# Altium PCB MainBoard.PcbDoc (part 1 of 5)
Units mm, origin at the board's own origin, x right, y up, seen from the top; angles counter-clockwise.
Board outline 82.15 x 81.5 mm, 4 copper layers (Top Layer, GND Top, GND Bot, Bottom Layer), stack 1.57 mm thick; 116 components, 97 nets, 468 pads, 3117 vias.
Unrouted connection lines stored in the file: 5.
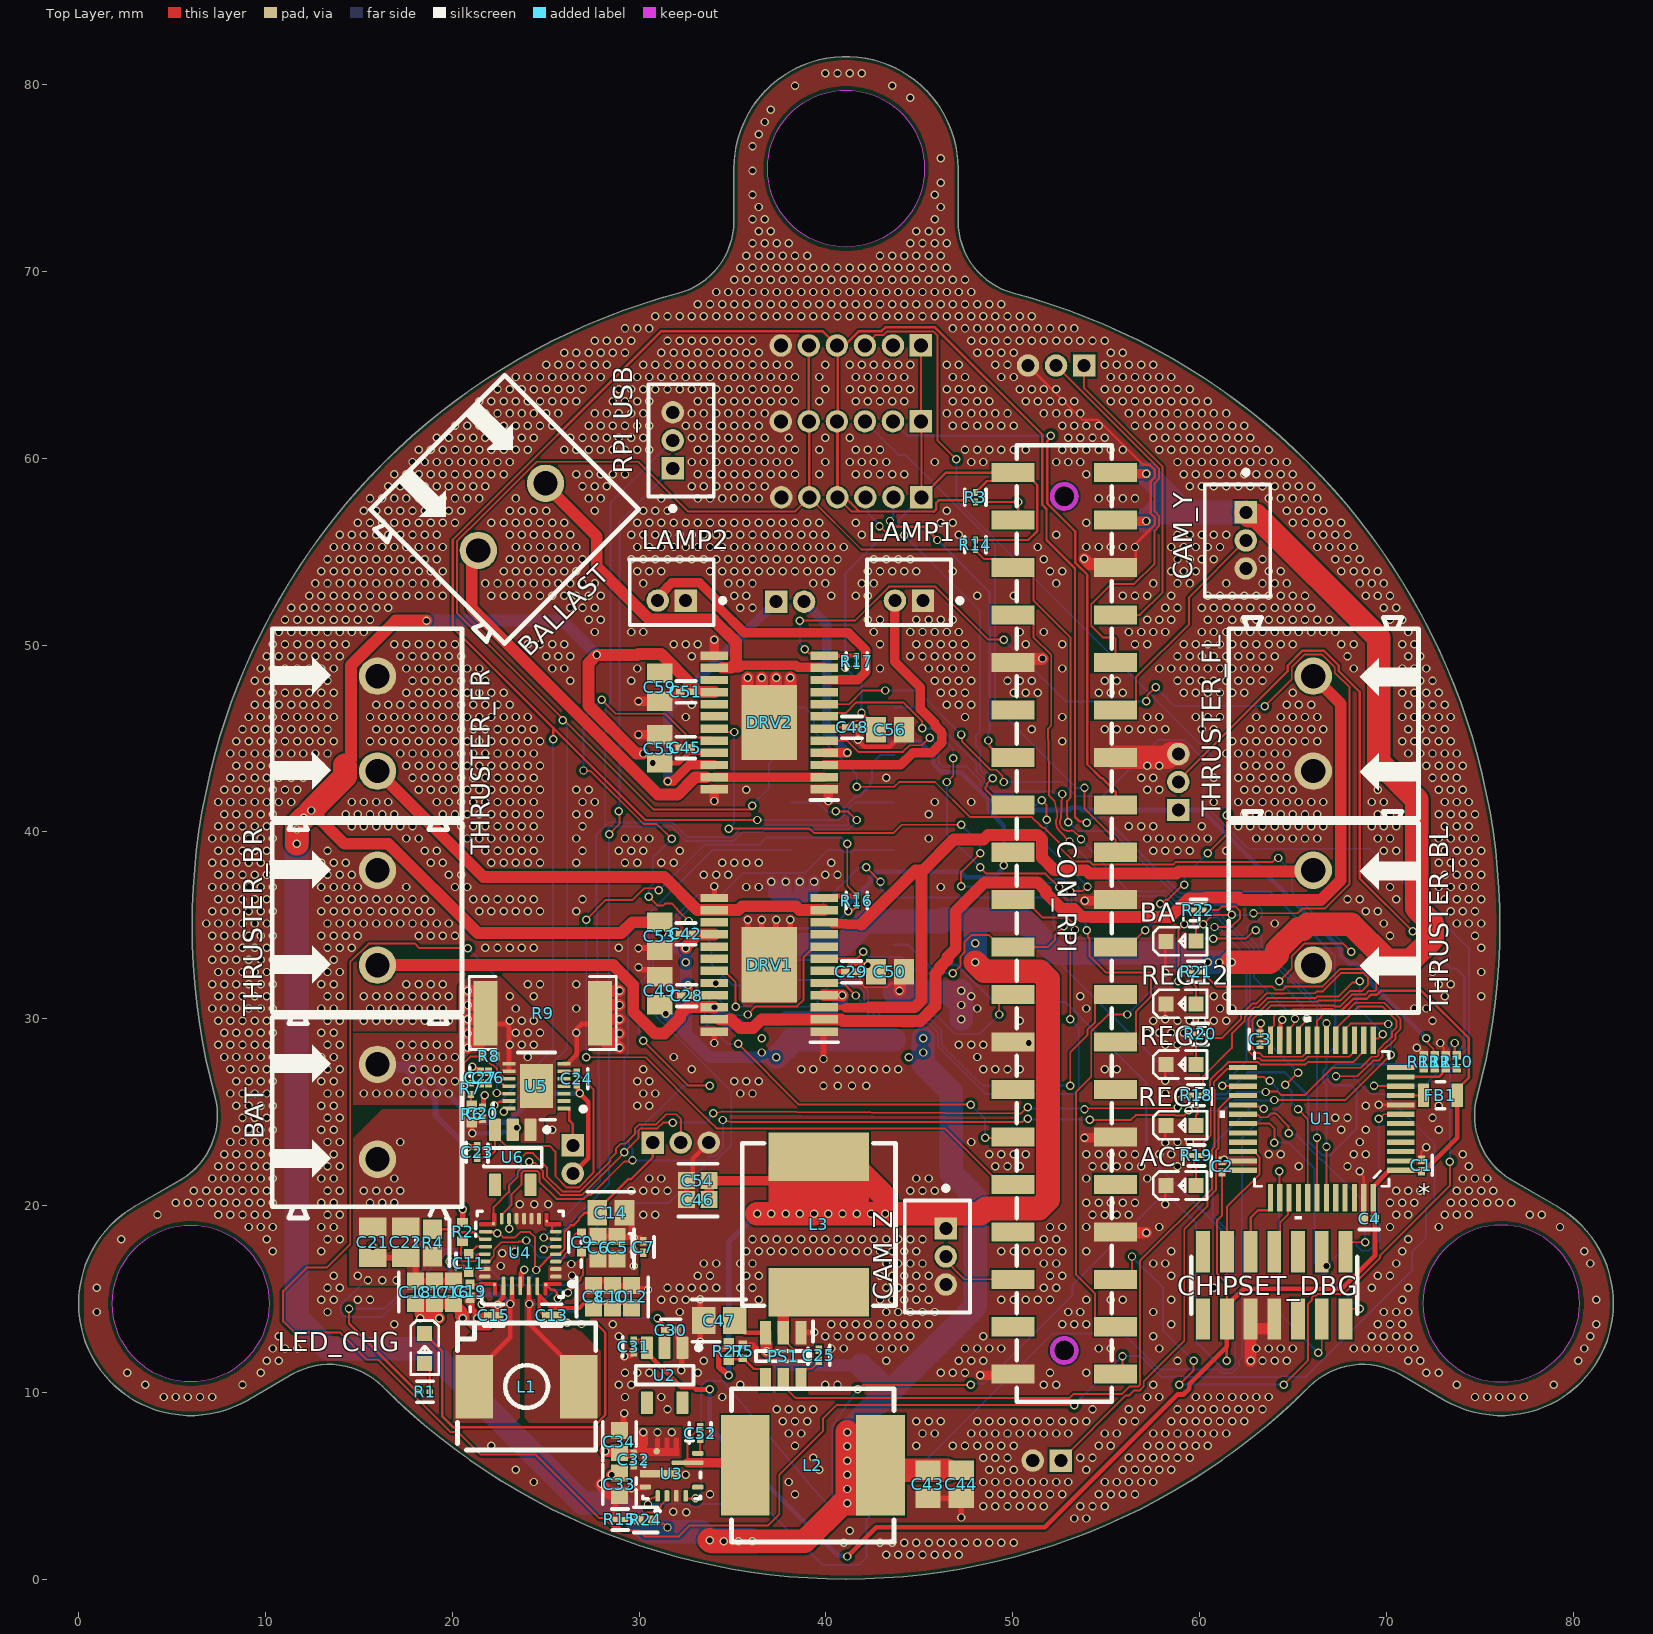
[diagram p0: Top Layer view]
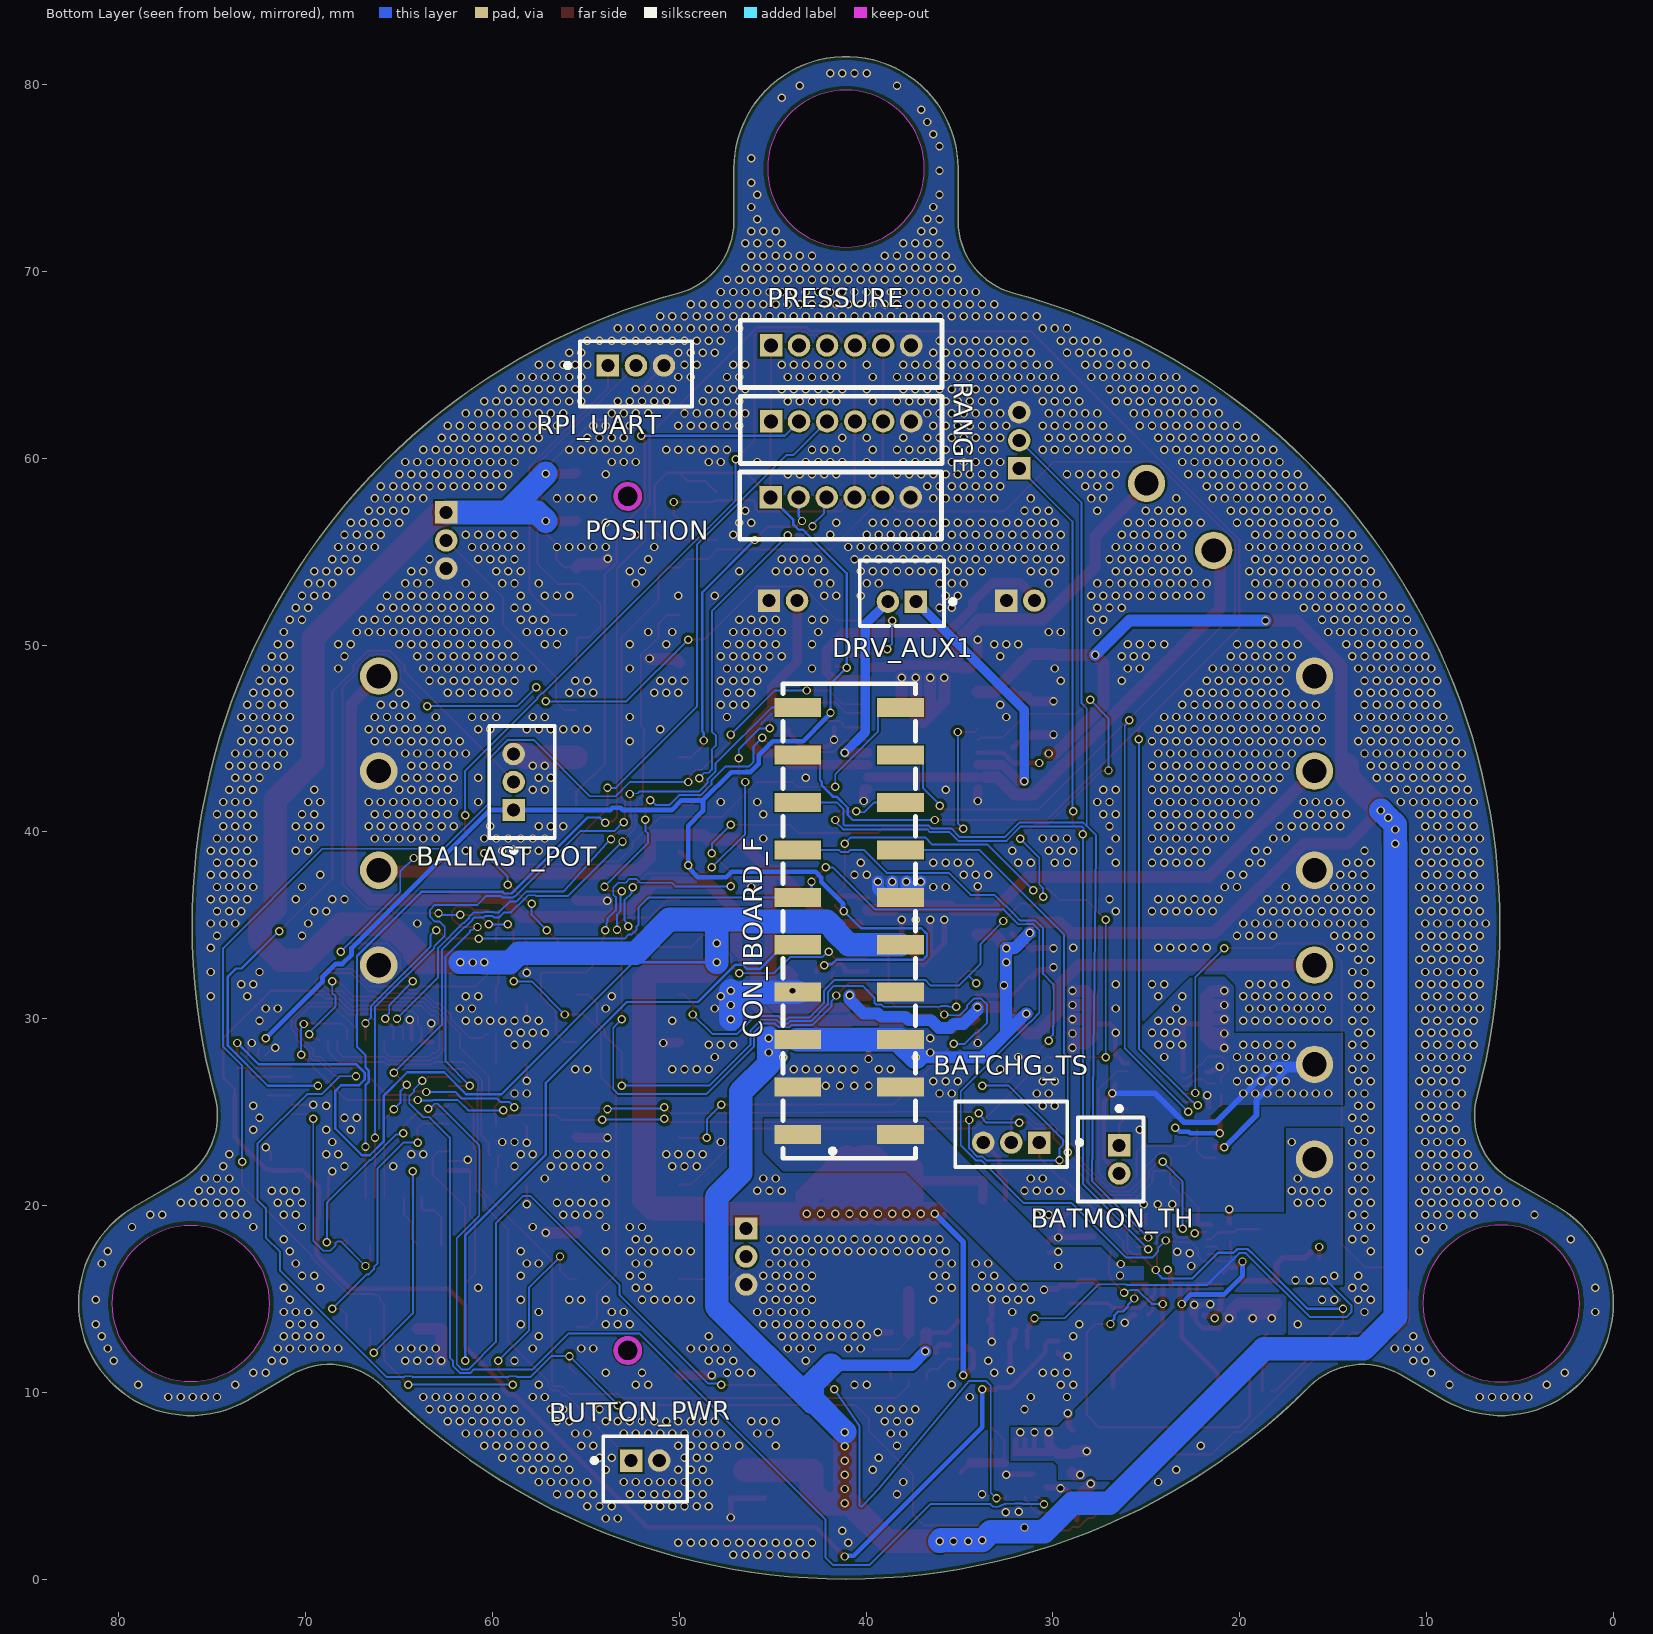
[diagram p1: Bottom Layer view, seen from below]
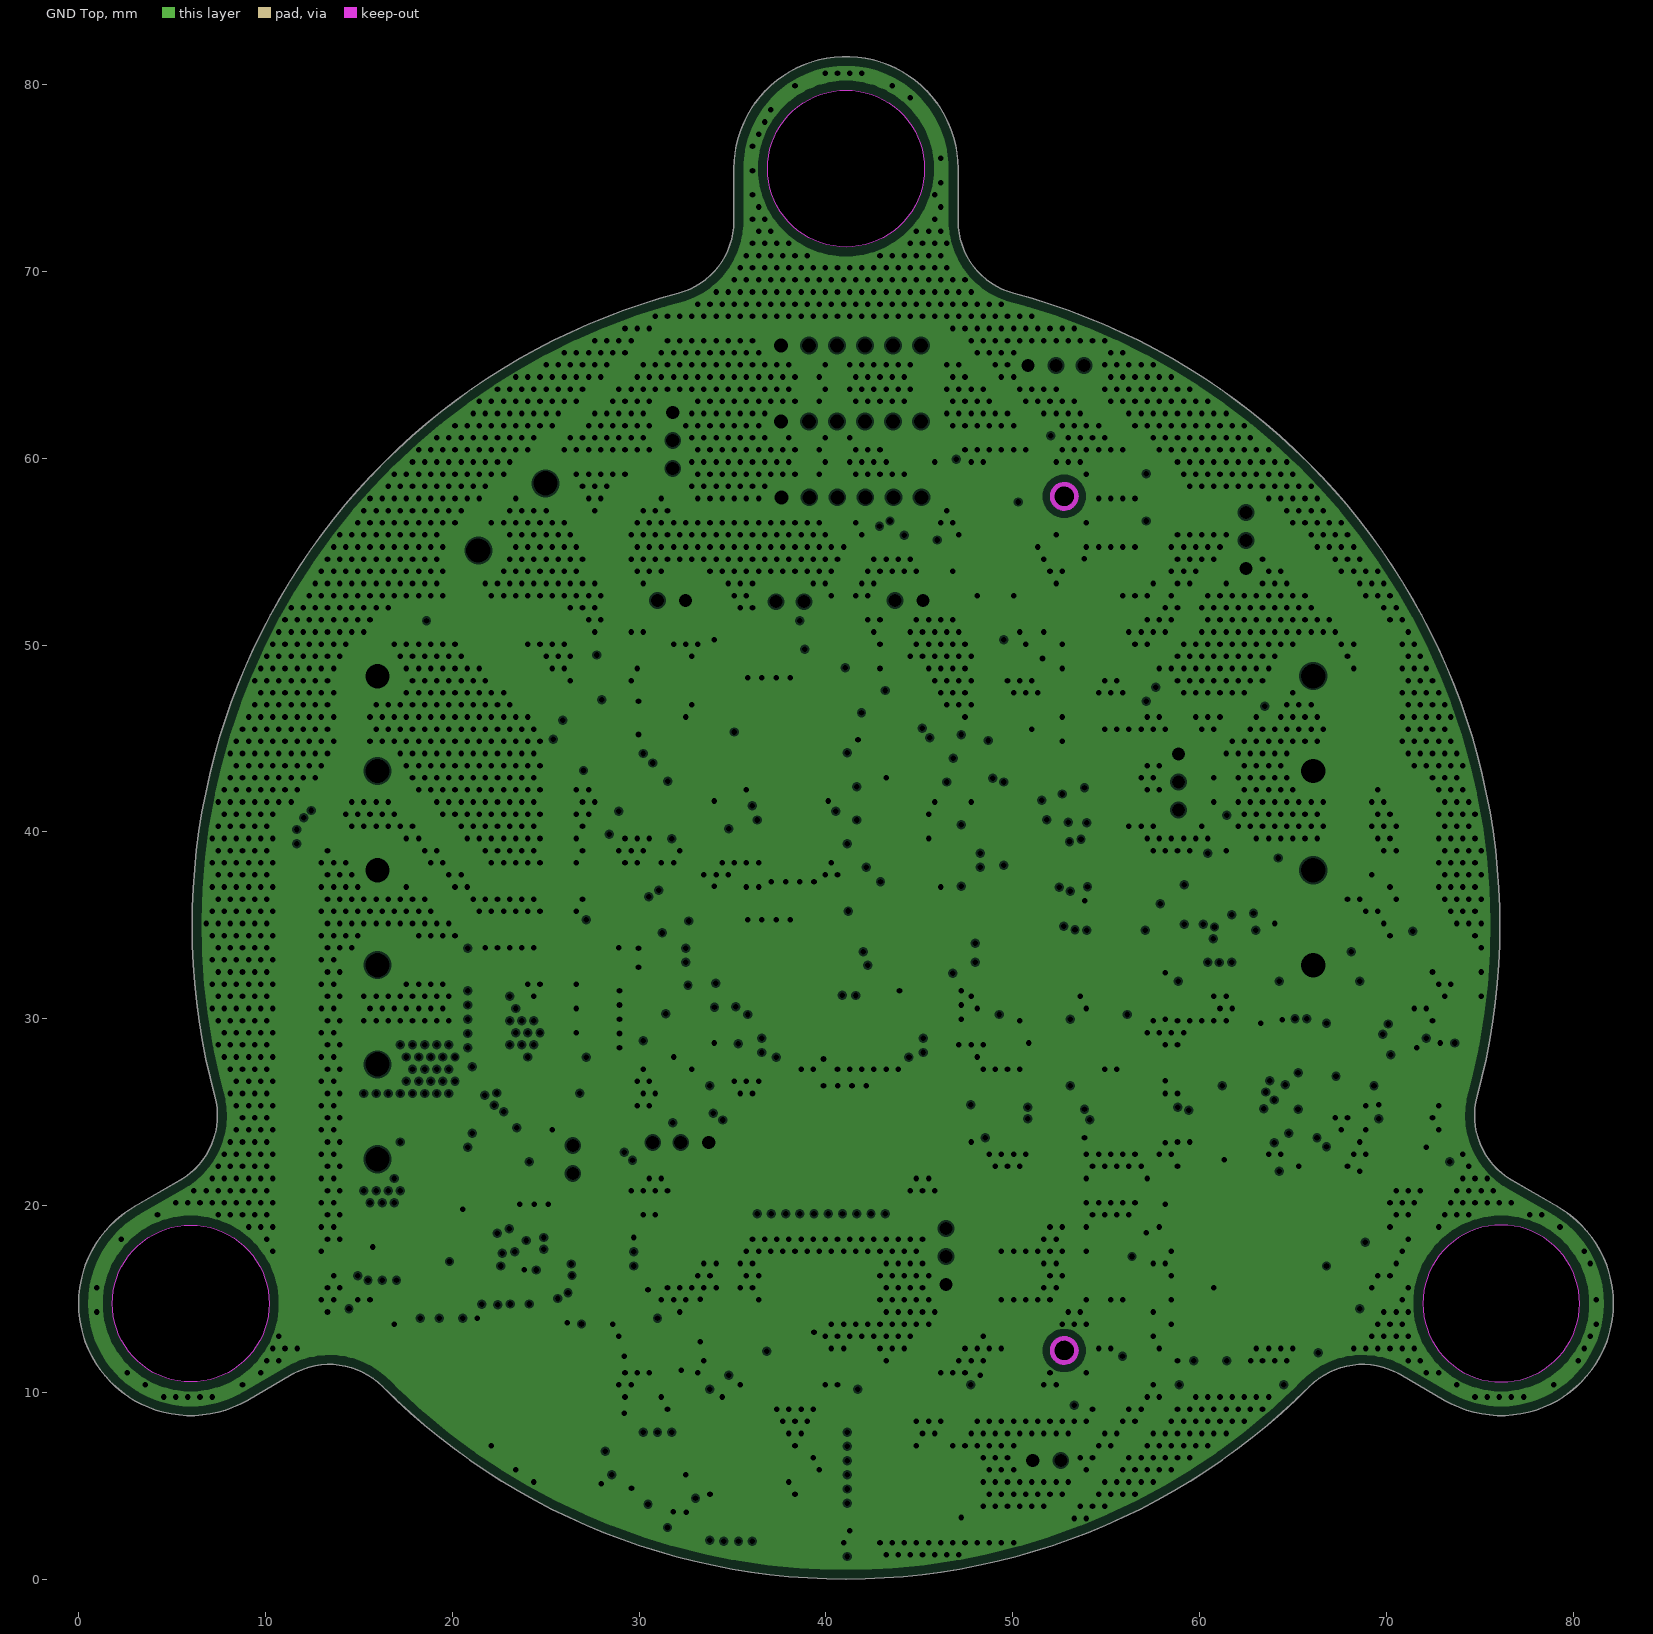
[diagram p2: GND Top, clearances drawn from the general rule]
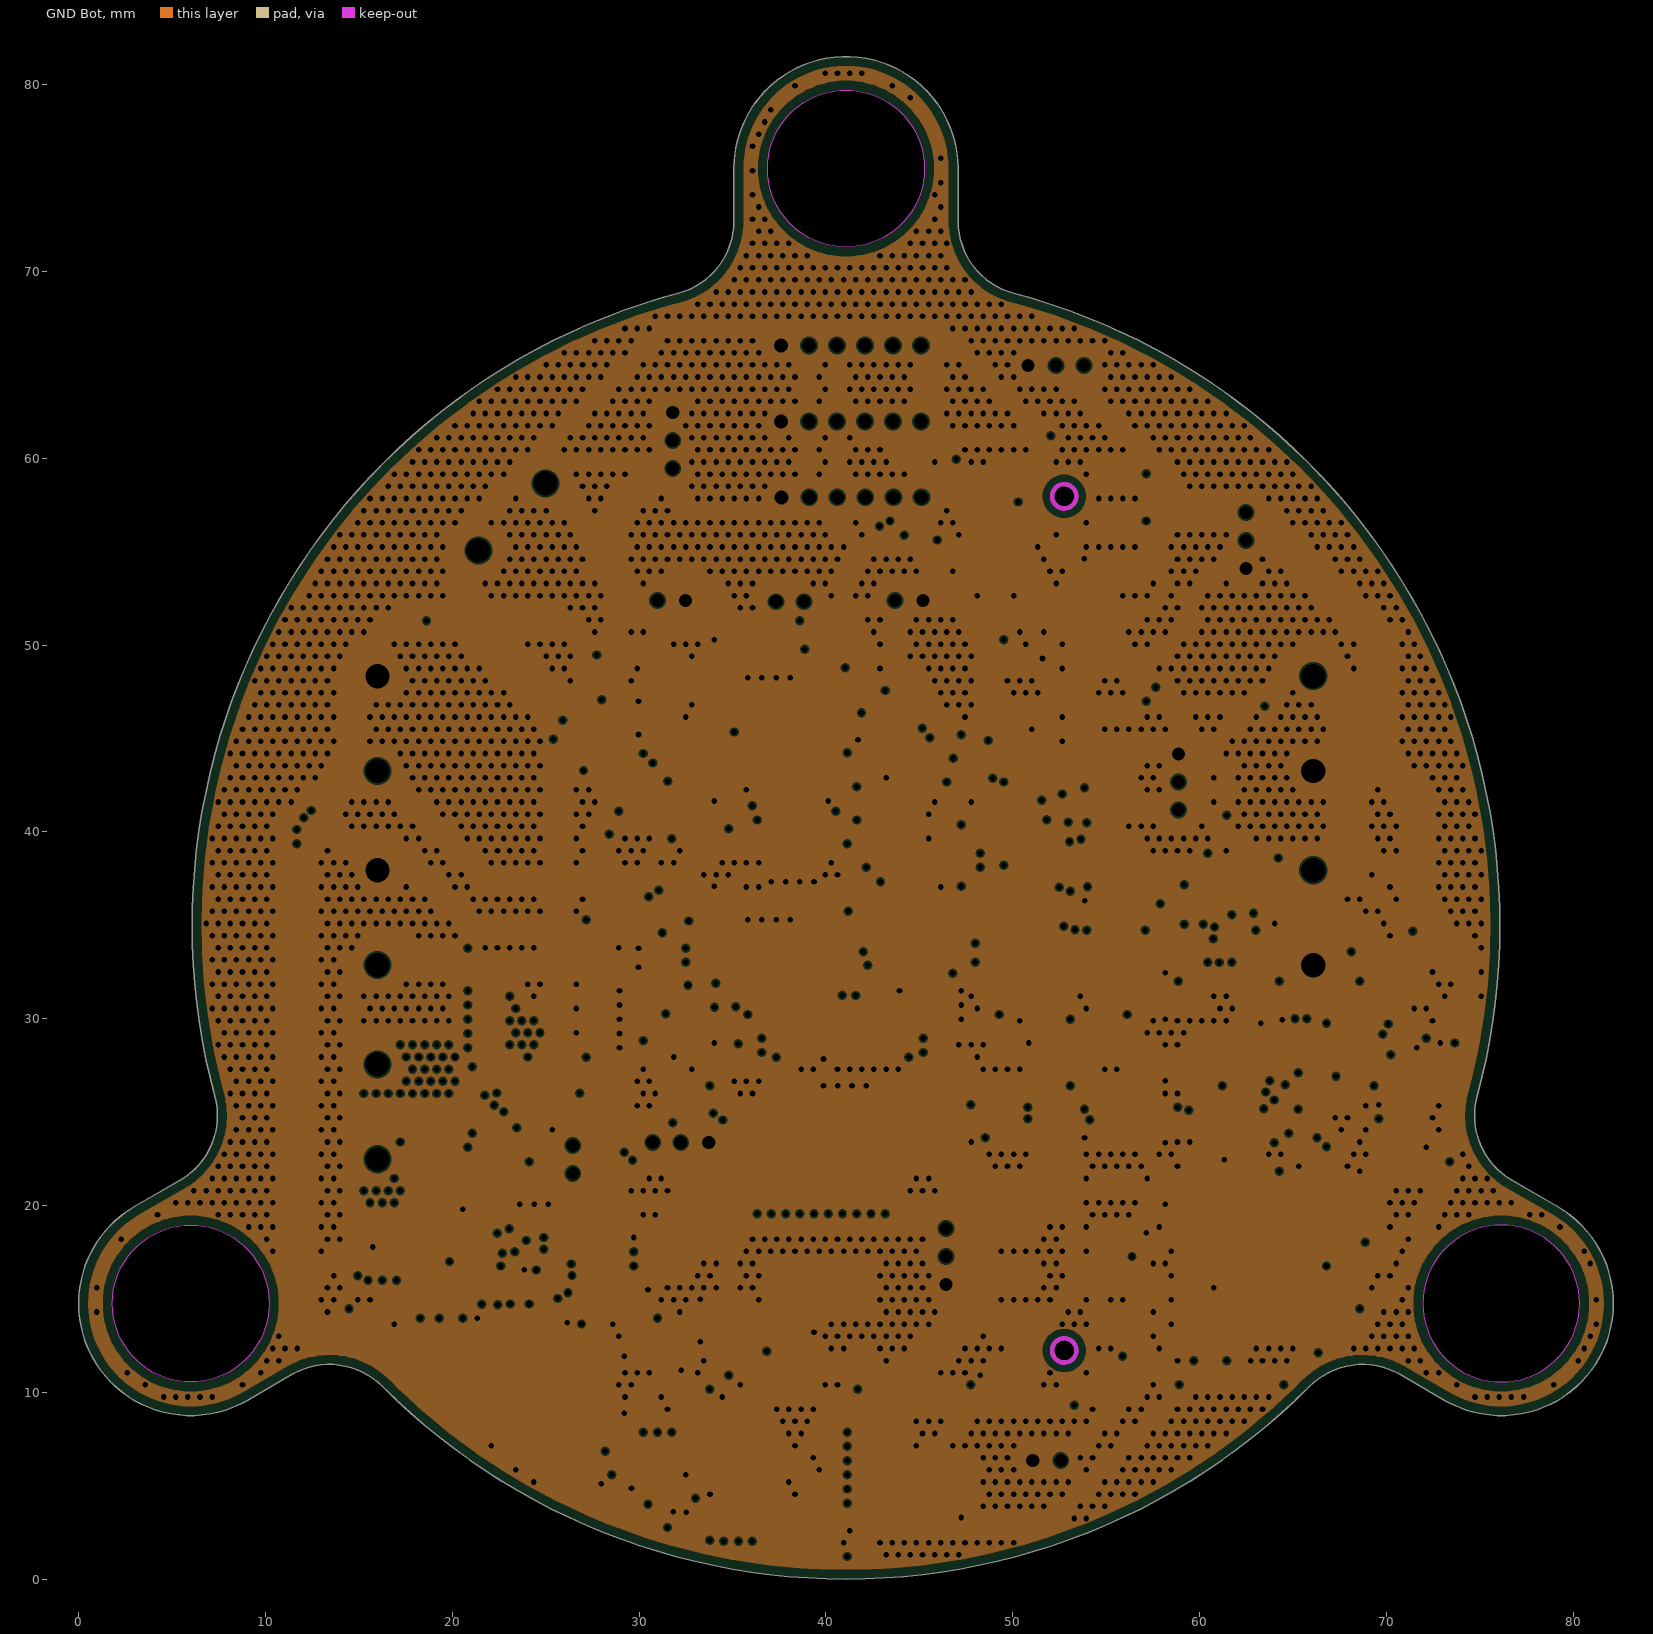
[diagram p3: GND Bot, clearances drawn from the general rule]
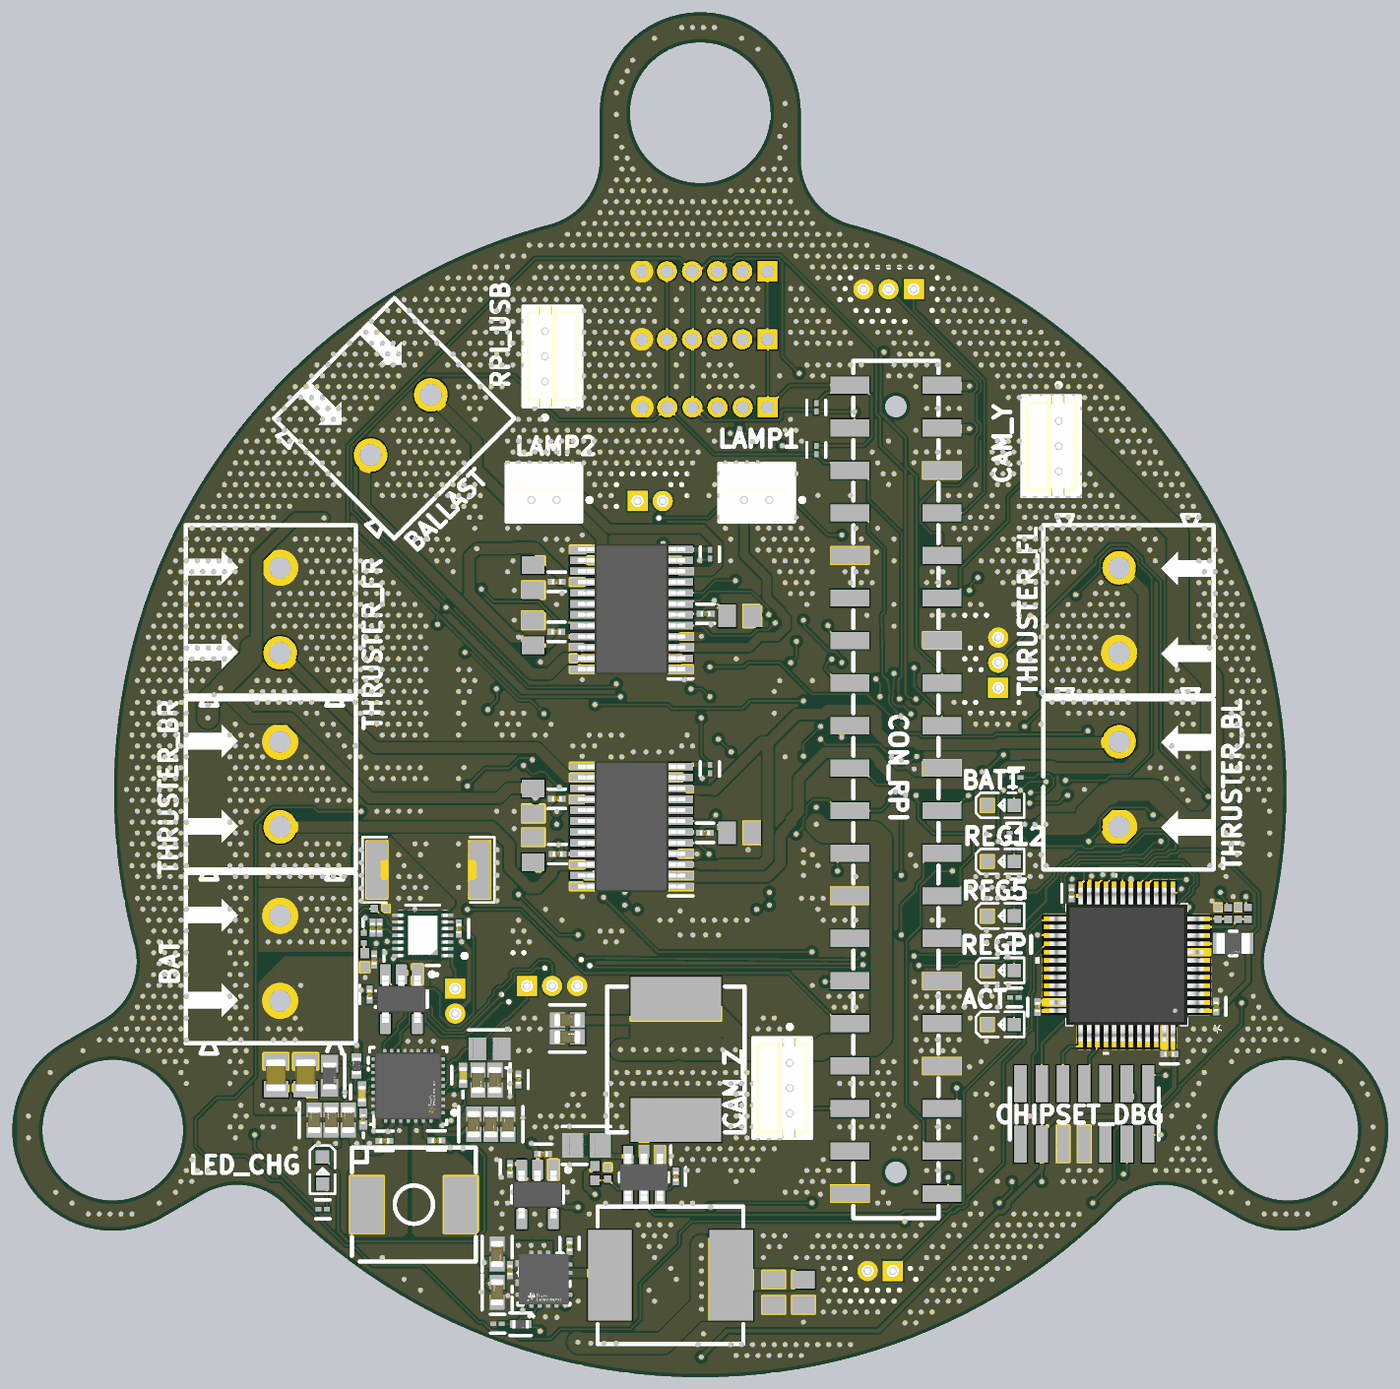
[diagram p7: 3D render of the assembled board from above, using the file's embedded part models]
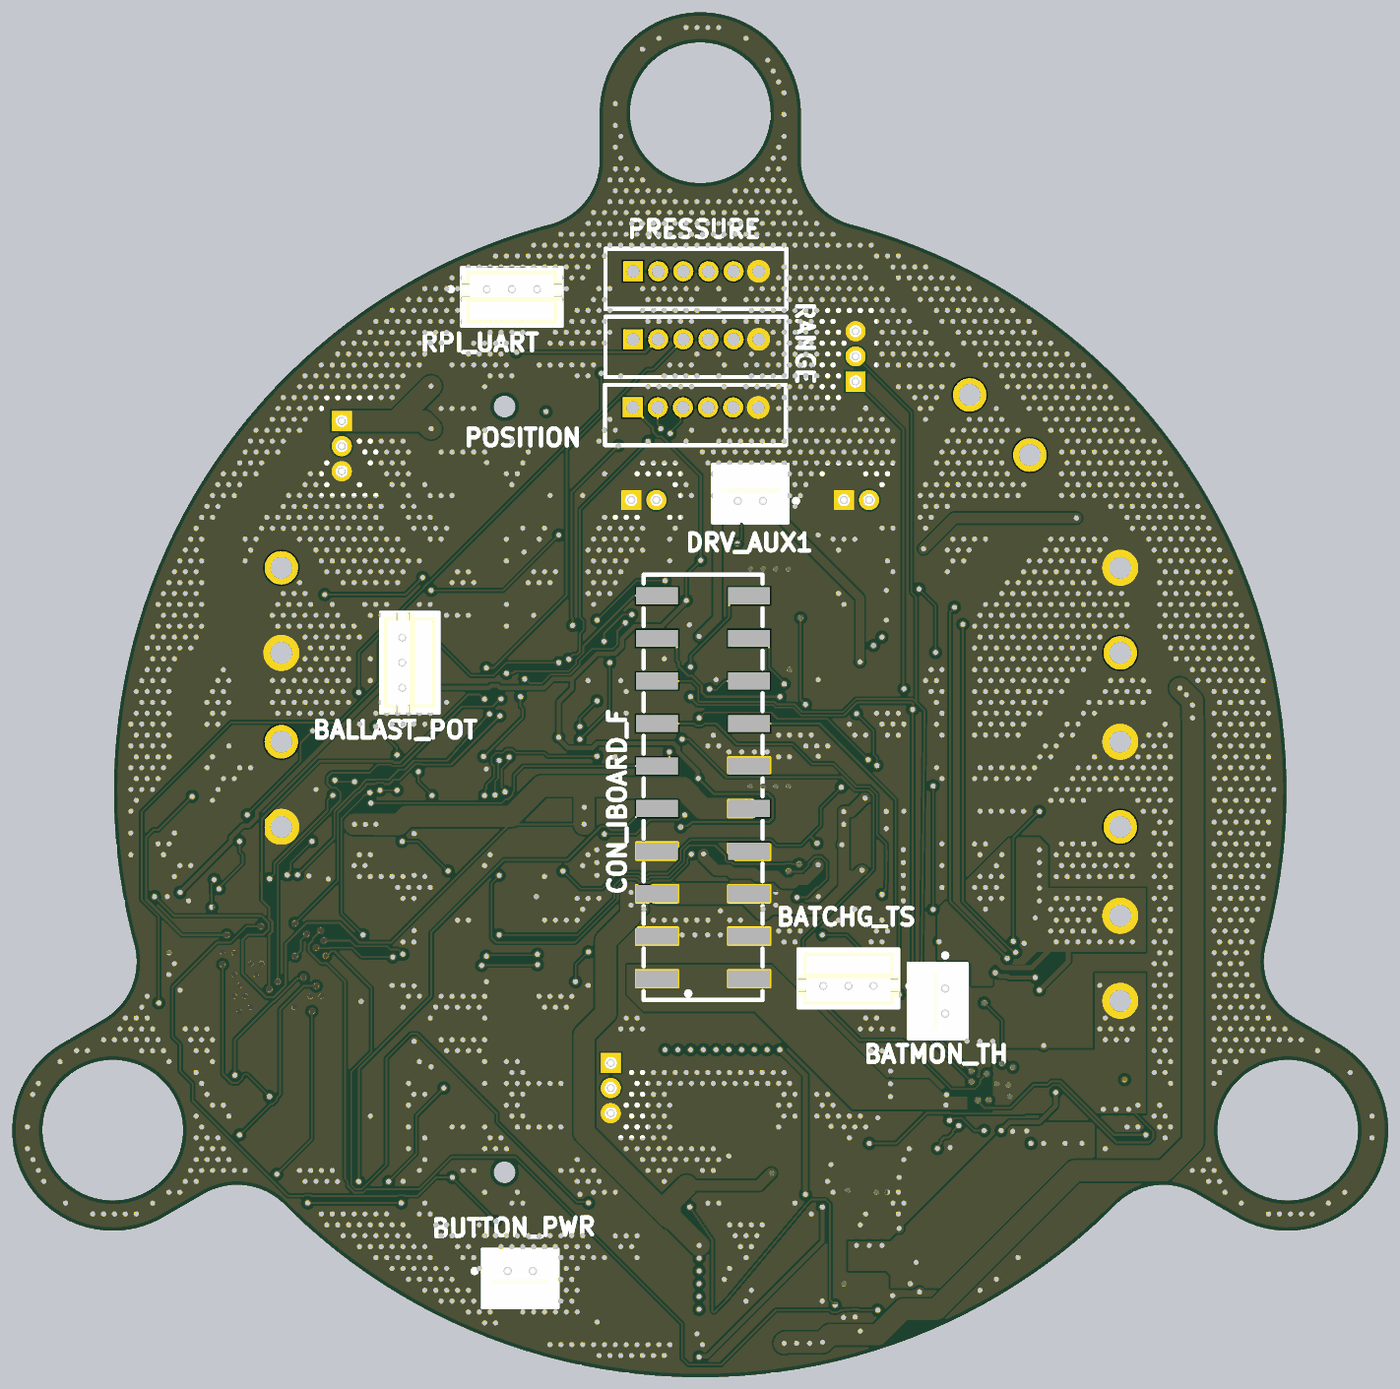
[diagram p8: 3D render of the assembled board from below, using the file's embedded part models]

## Layer stack, top to bottom
Top Solder: solder mask 0.0127, Solder Resist, Dk 3.8
Top Layer: signal copper 0.035
Dielectric 1: prepreg 0.2, 7628, Dk 4.6
GND Top: plane copper 0.0175, net GND
Core: core 1.065, FR-4, Dk 4.5
GND Bot: plane copper 0.0175, net GND
Dielectric 2: prepreg 0.2, 7628, Dk 4.6
Bottom Layer: signal copper 0.035
Bottom Solder: solder mask 0.0127, Solder Resist, Dk 3.8

## Board outline
9.006,9.56 11.435,10.962 cw(c13.435,7.498) 16.27,10.319 ccw(c41.08,35.006) 65.891,10.319 cw(c68.726,7.498) 70.726,10.962 73.154,9.56 ccw(c76.154,14.756) 79.154,19.953 76.726,21.354 cw(c78.726,24.819) 74.865,25.863 ccw(c41.08,35.006) 50.055,68.836 cw(c51.08,72.703) 47.08,72.703 47.08,75.506 ccw(c41.08,75.506) 35.08,75.506 35.08,72.703 cw(c31.08,72.702) 32.106,68.836 ccw(c41.08,35.006) 7.296,25.863 cw(c3.435,24.819) 5.435,21.354 3.006,19.953 ccw(c6.006,14.756)
cut-out: 71.954,14.756 ccw(c76.154,14.756) 76.154,10.556 ccw(c76.154,14.756) 80.354,14.756 ccw(c76.154,14.756) 76.154,18.956 ccw(c76.154,14.756)
cut-out: 41.08,71.306 cw(c41.08,75.506) 36.88,75.506 cw(c41.08,75.506) 41.08,79.706 cw(c41.08,75.506) 45.28,75.506 cw(c41.08,75.506)
cut-out: 1.806,14.756 cw(c6.006,14.756) 6.006,18.956 cw(c6.006,14.756) 10.206,14.756 cw(c6.006,14.756) 6.006,10.556 cw(c6.006,14.756)

## Design rules (kind name [scope] priority, off if disabled: settings)
BoardOutlineClearance [All] p1: gap=0.2 ignorepadtopadclearanceinfootprint=FALSE
Clearance [All] p1: gap=0.102 ignorepadtopadclearanceinfootprint=FALSE except(0.127: Arc-Via Track-Via SMDPad-Via THPad-Via Via-Via Via-Fill Via-Poly Via-Region Via-Text; 0.25: Arc-Hole Track-Hole SMDPad-Hole THPad-Hole Via-Hole Fill-Hole Poly-Hole Region-Hole Text-Hole)
ComponentClearance ComponentClearance_Terminal [HasFootprint('WJ500V-5.08-2P') vs HasFootprint('WJ500V-5.08-2P')] p1: gap=0 collisioncheckmode=3 verticalgap=0 showdistances=FALSE
ComponentClearance [All] p2: gap=0.102 collisioncheckmode=3 verticalgap=0.102 showdistances=TRUE
DiffPairsRouting [All] p1: maxlimit=0.102 minlimit=0.102 mostfreqgap=0.102 toplayer_minwidth=0.102 toplayer_maxwidth=1816.048 toplayer_prefwidth=0.102 bottomlayer_minwidth=0.102 bottomlayer_maxwidth=1816.048 bottomlayer_prefwidth=0.102 maxuncoupledlength=12.7
Height [All] p1: minheight=0 maxheight=1816.048 prefheight=12.7
HoleSize [All] p1: absolutevalues=TRUE maxlimit=6.3 minlimit=0.3 maxpercent=80.000 minpercent=20.000
HoleToHoleClearance [All] p1: gap=0.25 allowstackedmicrovias=FALSE
MinimumAnnularRing [All] p1: minimumring=0.001
MinimumSolderMaskSliver [All] p1: minsoldermaskwidth=0
PlaneClearance [All] p1: clearance=0.102
PlaneConnect PlaneConnect_PWR [InNetClass('HI_PWR')] p1: planeconnectstyle=Direct reliefexpansion=0.508 reliefentries=4 reliefconductorwidth=0.254 reliefairgap=0.254
PlaneConnect [All] p2: pad.planeconnectstyle=Relief pad.reliefexpansion=0.3 pad.reliefentries=4 pad.reliefconductorwidth=0.102 pad.reliefairgap=0.102 via.planeconnectstyle=Direct via.reliefexpansion=0.3 via.reliefentries=4 via.reliefconductorwidth=0.127 via.reliefairgap=0.127
PolygonConnect PolygonConnect_PWR [All vs (InNetClass('HI_PWR'))] p1: connectstyle=Direct reliefconductorwidth=0.254 reliefentries=4 polygonreliefangle="90 Angle" airgapwidth=0.254
PolygonConnect [All] p2: thpad.connectstyle=Relief thpad.reliefconductorwidth=0.102 thpad.reliefentries=4 thpad.polygonreliefangle="90 Angle" thpad.airgapwidth=0.102 smdpad.connectstyle=Relief smdpad.reliefconductorwidth=0.102 smdpad.reliefentries=4 smdpad.polygonreliefangle="90 Angle" smdpad.airgapwidth=0.102 via.connectstyle=Direct via.reliefconductorwidth=0.127 via.reliefentries=4 via.polygonreliefangle="90 Angle" via.airgapwidth=0.127
RoutingVias [All] p1: holewidth=0.3 width=0.45 viastyle="Through Hole" minholewidth=0.3 minwidth=0.45 maxholewidth=6.3 maxwidth=6.55
SilkToSilkClearance [All] p1: silktosilkclearance=0
SilkToSolderMaskClearance [IsPad] p1 off: minsilkscreentomaskgap=0.102 clearancetoexposedcopper=TRUE
SolderMaskExpansion SolderMaskExpansion_Vias [IsVia] p1: expansion=0.102 istentingtop=TRUE
SolderMaskExpansion [All] p2: expansion=0.075 istentingtop=FALSE
SupplyNets "Schematic Supply Nets_5" [InNet('3V3_LDO')] p1: voltage=0.000
SupplyNets "Schematic Supply Nets_1" [InNet('PACK-')] p2: voltage=0.000
SupplyNets "Schematic Supply Nets_7" [InNet('3.3V')] p3: voltage=0.000
SupplyNets "Schematic Supply Nets_4" [InNet('+12')] p4: voltage=0.000
SupplyNets "Schematic Supply Nets_2" [InNet('+5')] p5: voltage=0.000
SupplyNets "Schematic Supply Nets" [InNet('GND')] p6: voltage=0.000
Width Width_HI_PWR [InNetClass('HI_PWR')] p1: maxlimit=5.08 minlimit=0.102 preferedwidth=2.54
Width [All] p2: maxlimit=1816.048 minlimit=0.102 preferedwidth=0.102
20 further rules are at their usual default settings.

## Classes and differential pairs
component class IBOARD: CON_IBOARD_F
net class HI_PWR: +5 +12 BATCHG_SW1 BATCHG_SW2 BATCHG_SYS BATCHG_VBUS GND NetC52_1 PACK+ PACK-
component class Regulator12V: C32 C33 C34 C43 C44 C52 L2 R15 R24 U3
component class Regulator5V: C25 C46 C47 C54 L3 PS1 R5 R27
component class RaspberryPi: BALLAST_POT CAM_Y CAM_Z CON_RPI POSITION PRESSURE R3 R14 RANGE RPI_UART RPI_USB
component class Chipset: ACT BATT BUTTON_PWR C1 C2 C3 C4 C30 C31 CHIPSET_DBG FB1 R10 R11 R12 R13 R18 R19 R20 R21 R22 REG5 REG12 REGPI U1 U2
component class Driver: BALLAST C28 C29 C42 C45 C48 C49 C50 C51 C53 C55 C56 C59 DRV1 DRV2 DRV_AUX1 LAMP1 LAMP2 R16 R17 THRUSTER_BL THRUSTER_BR THRUSTER_FL THRUSTER_FR
component class BatteryMonitor: BAT BATMON_TH C20 C23 C24 C26 C27 R6 R7 R8 R9 U5 U6
component class BatteryCharger: BATCHG_TS C5 C6 C7 C8 C9 C10 C11 C12 C13 C14 C15 C16 C17 C18 C19 C21 C22 L1 LED_CHG R1 R2 R4 U4
differential pair USB: +USB_P -USB_N

## Components (designator, comment, footprint, x,y, rotation, side; value= is the part's Value field where it differs from the comment)
ACT "XL-1608SURC-06" XL-1608SURC-06 58.928,21.082 r0 top
BALLAST "WJ500V-5.08-2P" WJ500V-5.08-2P 22.929,57.135 r45 top
BALLAST_POT "B3B-ZR-3.4(LF)(SN)(P)" FP-B3B-ZR-3_4_LF_SN_P-MFG 58.42,42.672 r270 bottom
BAT "WJ500V-5.08-2P" WJ500V-5.08-2P 15.621,25.019 r90 top locked
BATCHG_TS "B3B-ZR-3.4(LF)(SN)(P)" FP-B3B-ZR-3_4_LF_SN_P-MFG 32.234,23.818 r180 bottom
BATMON_TH "B2B-ZR-3.4(LF)(SN)" FP-B2B-ZR-3_4_LF_SN-MFG 26.906,22.467 r90 bottom
BATT "XL-1608SURC-06" XL-1608SURC-06 58.928,34.163 r0 top
BUTTON_PWR "B2B-ZR-3.4(LF)(SN)" FP-B2B-ZR-3_4_LF_SN-MFG 51.828,5.9 r0 bottom
C1 "GRM033R61E104KE14D" FP-GRM033-0_03-IPC_B 71.882,22.148 r90 top
C2 "GRM033R61E104KE14D" FP-GRM033-0_03-IPC_B 61.214,22.098 r90 top
C3 "GRM033R61E104KE14D" FP-GRM033-0_03-IPC_B 63.246,28.906 r90 top
C4 "GRM033R61E104KE14D" FP-GRM033-0_03-IPC_B 69.088,19.304 r180 top
C5 "GRM188R6YA106MA73D" FP-GRM188-0_2-IPC_C 28.829,17.746 r270 top
C6 "GRM188R6YA106MA73D" FP-GRM188-0_2-IPC_C 27.813,17.746 r270 top
C7 "GRM033R61E104KE14D" FP-GRM033-0_03-IPC_B 30.226,17.78 r90 top
C8 "GRM188R6YA106MA73D" FP-GRM188-0_2-IPC_C 27.559,15.113 r270 top
C9 "CC0402KRX7R9BB473" FP-CC0402-MFG 26.924,18.034 r270 top value="47 nF"
C10 "GRM188R6YA106MA73D" FP-GRM188-0_2-IPC_C 28.575,15.113 r270 top
C11 "CC0402KRX7R9BB473" FP-CC0402-MFG 20.885,16.923 r90 top value="47 nF"
C12 "GRM188R6YA106MA73D" FP-GRM188-0_2-IPC_C 29.591,15.113 r90 top
C13 "GRM033R61E104KE14D" FP-GRM033-0_03-IPC_B 25.332,14.139 r0 top
C14 "CL21A475KBQNNNE" FP-CL21-IPC_C 28.499,19.609 r180 top
C15 "GRM033R61E104KE14D" FP-GRM033-0_03-IPC_B 22.225,14.122 r180 top
C16 "GRM188R6YA106MA73D" FP-GRM188-0_2-IPC_C 20.066,15.367 r90 top
C17 "GRM188R6YA106MA73D" FP-GRM188-0_2-IPC_C 19.05,15.367 r90 top
C18 "GRM188R6YA106MA73D" FP-GRM188-0_2-IPC_C 18.034,15.367 r90 top
C19 "GRM033R71H102KA12D" FP-GRM033-0_03-IPC_A 20.955,15.418 r270 top
C20 "GRM033R61E104KE14D" FP-GRM033-0_03-IPC_B 21.615,24.943 r270 top
C21 "CL21A106KBYQNNE" CAPC2012X145N 15.748,18.034 r90 top
C22 "CL21A106KBYQNNE" CAPC2012X145N 17.526,18.034 r90 top
C23 "GRM033R61E104KE14D" FP-GRM033-0_03-IPC_B 21.336,22.86 r270 top
C24 "GRM033R61E104KE14D" FP-GRM033-0_03-IPC_B 26.67,26.797 r270 top
C25 "GRM033R61E104KE14D" FP-GRM033-0_03-IPC_B 39.624,11.988 r270 top
C26 "GRM033R61E104KE14D" FP-GRM033-0_03-IPC_B 21.94,26.853 r270 top
C27 "GRM033R61E104KE14D" FP-GRM033-0_03-IPC_B 21.526,26.853 r270 top
C28 "GRM033R61E104KE14D" FP-GRM033-0_03-IPC_B 32.562,31.242 r180 top
C29 "GRM033R61E104KE14D" FP-GRM033-0_03-IPC_B 41.352,32.512 r180 top
C30 "GRM033R61E104KE14D" FP-GRM033-0_03-IPC_B 31.7,13.335 r180 top
C31 "GRM033R61E104KE14D" FP-GRM033-0_03-IPC_B 29.718,12.446 r90 top
C32 "GRM033R61E104KE14D" FP-GRM033-0_03-IPC_B 29.718,6.4 r90 top
C33 "GRM188R6YA106MA73D" FP-GRM188-0_2-IPC_C 28.956,5.08 r90 top
C34 "GRM188R6YA106MA73D" FP-GRM188-0_2-IPC_C 28.956,7.366 r270 top
C42 "GRM033R61E104KE14D" FP-GRM033-0_03-IPC_B 32.512,34.544 r0 top
C43 "CL21A226MAQNNNE" CAPC2013X140X45LL15T25 45.466,5.08 r90 top
C44 "CL21A226MAQNNNE" CAPC2013X140X45LL15T25 47.244,5.08 r90 top
C45 "GRM033R61E104KE14D" FP-GRM033-0_03-IPC_B 32.478,44.516 r180 top
C46 "GRM188R6YA106MA73D" FP-GRM188-0_2-IPC_C 33.147,20.32 r0 top
C47 "CL21A225KBQNNNE" FP-CL21-IPC_B 34.29,13.843 r180 top
C48 "GRM033R61E104KE14D" FP-GRM033-0_03-IPC_B 41.402,45.593 r180 top
C49 "CL21A226MAQNNNE" CAPC2013X140X45LL15T25 31.115,31.496 r270 top
C50 "CL21A226MAQNNNE" CAPC2013X140X45LL15T25 43.434,32.512 r180 top
C51 "GRM033R61E104KE14D" FP-GRM033-0_03-IPC_B 32.512,47.498 r0 top
C52 "GRM033R61E104KE14D" FP-GRM033-0_03-IPC_B 33.274,7.824 r270 top
C53 "CL21A226MAQNNNE" CAPC2013X140X45LL15T25 31.115,34.417 r90 top
C54 "GRM188R6YA106MA73D" FP-GRM188-0_2-IPC_C 33.147,21.336 r0 top
C55 "CL21A226MAQNNNE" CAPC2013X140X45LL15T25 31.115,44.45 r270 top
C56 "CL21A226MAQNNNE" CAPC2013X140X45LL15T25 43.434,45.466 r180 top
C59 "CL21A226MAQNNNE" CAPC2013X140X45LL15T25 31.115,47.752 r90 top
CAM_Y "B3B-ZR-3.4(LF)(SN)(P)" FP-B3B-ZR-3_4_LF_SN_P-MFG 62.034,55.602 r90 top
CAM_Z "B3B-ZR-3.4(LF)(SN)(P)" FP-B3B-ZR-3_4_LF_SN_P-MFG 45.974,17.272 r90 top
CHIPSET_DBG "X1321WVS-2x07J-C40D53" X1321WVS-2x07J-C40D53 64.008,15.748 r0 top
CON_IBOARD_F "I-BOARD" HC-PM254-8.5H-2x10PS 41.08,35.23 r90 bottom locked
CON_RPI "FH-00148-RPI" FH-00148 52.718,35.23 r270 top locked
DRV1 "DRV8908QPWPRQ1" SOP65P640X120-25N 36.974,32.889 r180 top
DRV2 "DRV8908QPWPRQ1" SOP65P640X120-25N 36.974,45.858 r180 top
DRV_AUX1 "B2B-ZR-3.4(LF)(SN)" FP-B2B-ZR-3_4_LF_SN-MFG 38.088,52.774 r180 bottom
FB1 "BLM21AG102SN1D" FP-BLM21-0_2-t0_85-e0_5-MFG 72.898,25.908 r0 top
L1 "SPM6530T-1R0M120" SPM6530T-1R0M120 23.978,10.312 r0 top
L2 "IHLP3232DZER5R6M11" IHLP3232DZER5R6M11 39.37,6.096 r0 top
L3 "IHLP3232DZER5R6M11" IHLP3232DZER5R6M11 39.624,19.05 r90 top
LAMP1 "B2B-ZR-3.4(LF)(SN)" FP-B2B-ZR-3_4_LF_SN-MFG 44.45,52.832 r0 top
LAMP2 "B2B-ZR-3.4(LF)(SN)" FP-B2B-ZR-3_4_LF_SN-MFG 31.75,52.832 r0 top
LED_CHG "XL-1608SURC-06" XL-1608SURC-06 18.542,12.446 r270 top
POSITION "B6B-ZR(LF)(SN)" B6B-ZR(LF)(SN) 41.306,57.912 r180 bottom
PRESSURE "B6B-ZR(LF)(SN)-ABP2LANT060PG2A3XX" B6B-ZR(LF)(SN) 41.282,66.04 r180 bottom
PS1 "LMR51430XDDCR" SOT95P280X110-6N 37.719,11.938 r270 top
R1 "RC0201JR-0710KL" FP-RC0201-0_26-IPC_C 18.542,10.033 r0 top
R2 "RT0402BRD0717K4L" FP-RT0402-MFG 20.557,18.595 r90 top value=17.4KΩ
R3 "RC0201JR-0710KL" FP-RC0201-0_26-IPC_C 48.006,57.912 r90 top
R4 "ERA-3AEB101V" FP-ERA3A-IPC_B 18.953,18.004 r270 top
R5 "13K7 1% 0201(0603)" RESC0201(0603)_N 35.56,12.192 r270 top value="13700.00 Ohm"
R6 "RC0402FR-071M5L" RESC1005X40X25NL05T10 21.048,24.896 r270 top
R7 "RC0201FR-07300KL" RESC0201(0603)_L 21.002,26.245 r270 top value="300000.00 Ohm"
R8 "200K 1% 0201(0603)" RESC0201(0603)_N 21.97,27.985 r180 top value="200000.00 Ohm"
R9 "HoYLR2512-3W-10mR-1%" HoYLR2512-3W-10mR-1% 24.867,30.429 r180 top
R10 "200K 1% 0201(0603)" RESC0201(0603)_N 73.779,27.704 r90 top value="200000.00 Ohm"
R11 "200K 1% 0201(0603)" RESC0201(0603)_N 73.186,27.704 r270 top value="200000.00 Ohm"
R12 "200K 1% 0201(0603)" RESC0201(0603)_N 72.598,27.69 r90 top value="200000.00 Ohm"
R13 "200K 1% 0201(0603)" RESC0201(0603)_N 72.006,27.709 r270 top value="200000.00 Ohm"
R14 "RC0201JR-0710KL" FP-RC0201-0_26-IPC_C 48.006,55.372 r90 top
R15 "RC0201JR-0710KL" FP-RC0201-0_26-IPC_C 28.981,3.196 r0 top
R16 "RC0201JR-0710KL" FP-RC0201-0_26-IPC_C 41.656,36.322 r90 top
R17 "RC0201JR-0710KL" FP-RC0201-0_26-IPC_C 41.656,49.149 r90 top
R18 "RC0201JR-0710KL" FP-RC0201-0_26-IPC_C 59.817,25.908 r180 top
R19 "RC0201JR-0710KL" FP-RC0201-0_26-IPC_C 59.842,22.682 r180 top
R20 "RC0201JR-0710KL" FP-RC0201-0_26-IPC_C 60.046,29.185 r180 top
R21 "RC0201JR-0710KL" FP-RC0201-0_26-IPC_C 59.817,32.512 r180 top
R22 "RC0201JR-0710KL" FP-RC0201-0_26-IPC_C 59.944,35.814 r180 top
R24 "AC0402FR-07191KL" FP-AC0402-IPC_C 30.353,3.175 r0 top
R27 "RC0402FR-07100KL" RESC1005X40X25NL05T10 34.798,12.192 r90 top
RANGE "B6B-ZR(LF)(SN)-VL53L1CXV0FY/1" B6B-ZR(LF)(SN) 41.282,61.976 r180 bottom
REG5 "XL-1608SURC-06" XL-1608SURC-06 58.928,27.559 r0 top
REG12 "XL-1608SURC-06" XL-1608SURC-06 58.928,30.81 r0 top
REGPI "XL-1608SURC-06" XL-1608SURC-06 58.928,24.308 r0 top
RPI_UART "B3B-ZR-3.4(LF)(SN)(P)" FP-B3B-ZR-3_4_LF_SN_P-MFG 52.324,64.516 r0 bottom
RPI_USB "B3B-ZR-3.4(LF)(SN)(P)" FP-B3B-ZR-3_4_LF_SN_P-MFG 32.258,60.96 r270 top
THRUSTER_BL "WJ500V-5.08-2P" WJ500V-5.08-2P 66.472,35.408 r270 top locked
THRUSTER_BR "WJ500V-5.08-2P" WJ500V-5.08-2P 15.621,35.408 r90 top locked
THRUSTER_FL "WJ500V-5.08-2P" WJ500V-5.08-2P 66.472,45.796 r270 top locked
THRUSTER_FR "WJ500V-5.08-2P" WJ500V-5.08-2P 15.621,45.796 r90 top locked
U1 "STM32U031C8T6" LQFP48_STM 66.548,24.638 r180 top
U2 "TLV70433DBVR" DBV0005A_M 31.369,10.922 r270 top
U3 "TPS56637RPAR" FP-RPA0010A-MFG 31.747,5.861 r90 top
U4 "BQ25792RQMR" FP-RQM0029A-MFG 23.647,17.399 r180 top
U5 "MAX17261METD+" FP-T1433-2C-MFG 24.511,26.391 r180 top
U6 "TLV70433DBVR" DBV0005A_M 23.241,22.581 r270 top

## Footprints (in the part's own frame and the unit in brackets; to place one, negate y for a bottom-side part, rotate by r counter-clockwise, add the part's x,y. Pads: shape width x height; smd on the part's side, far side on the other; paste and mask are expansions set on the pad)
B6B-ZR(LF)(SN) [mm]
  rect 1.2x1.2 hole 0.75: 1(-3.81,0)
  round 1.2 hole 0.75: 2(-2.31,0) 3(-0.81,0) 4(0.69,0) 5(2.19,0) 6(3.69,0)
  silkscreen extent -5.46,-2.25 5.34,1.35
CAPC2012X145N [mm]
  rect 0.97x1.47 smd: 1(-0.83,0) 2(0.83,0)
  body extent -1,-0.63 1,0.63, height 1.45
CAPC2013X140X45LL15T25 [mm] "Chip Capacitor, 2-Leads, Body 2.00x1.25mm, IPC High Density"
  rect 1.05x1.35 smd: 1(-0.75,0) 2(0.75,0)
  body extent -1.08,-0.7 1.07,0.7, height 1.4
DBV0005A_M [mm] "SOT23, 5-Leads, Body 3.05x1.75mm, Pitch 0.95mm, IPC Low Density"
  rrect15% 1.2x0.65 smd: 1(-1.475,0.95) 2(-1.475,0) 3(-1.475,-0.95) 4(1.475,-0.95) 5(1.475,0.95)
  silkscreen extent -1.6,-1.55 0.5,1.95, body extent -1.42,-1.46 1.42,1.46, height 1.08
FH-00148 [mm]
  rect 1.02x2.3 smd paste+0 mask+0.051: 1(-24.003,-2.706) 2(-24.003,2.794) 3(-21.463,-2.706) 4(-21.463,2.794) 5(-18.923,-2.706) 6(-18.923,2.794) 7(-16.383,-2.706) 8(-16.383,2.794) 9(-13.843,-2.706) 10(-13.843,2.794) 11(-11.303,-2.706) 12(-11.303,2.794) 13(-8.763,-2.706) 14(-8.763,2.794) 15(-6.223,-2.706) 16(-6.223,2.794) 17(-3.683,-2.706) 18(-3.683,2.794) 19(-1.143,-2.706) 20(-1.143,2.794) 21(1.397,-2.706) 22(1.397,2.794) 23(3.937,-2.706) 24(3.937,2.794) 25(6.477,-2.706) 26(6.477,2.794) 27(9.017,-2.706) 28(9.017,2.794) 29(11.557,-2.706) 30(11.557,2.794) 31(14.097,-2.706) 32(14.097,2.794) 33(16.637,-2.706) 34(16.637,2.794) 35(19.177,-2.706) 36(19.177,2.794) 37(21.717,-2.706) 38(21.717,2.794) 39(24.257,-2.706) 40(24.257,2.794)
  Keep-Out Layer board cut-out: 23.637,0.044 23.573,0.326 23.392,0.552 23.132,0.678 22.842,0.678 22.582,0.552 22.401,0.326 22.337,0.044 22.337,0.044 22.401,-0.238 22.582,-0.464 22.842,-0.59 23.132,-0.59 23.392,-0.464 23.573,-0.238 23.637,0.044
  Keep-Out Layer board cut-out: -22.083,0.044 -22.147,0.326 -22.328,0.552 -22.588,0.678 -22.878,0.678 -23.138,0.552 -23.319,0.326 -23.383,0.044 -23.383,0.044 -23.319,-0.238 -23.138,-0.464 -22.878,-0.59 -22.588,-0.59 -22.328,-0.464 -22.147,-0.238 -22.083,0.044
  Multi-Layer keep-out circle w0.254: c22.987,0.044 r0.65
  Multi-Layer keep-out circle w0.254: c-22.733,0.044 r0.65
  silkscreen extent -25.47,-2.5 25.73,2.58
FP-AC0402-IPC_C [mm]
  rect 0.515x0.472 smd paste+0 mask+0: 1(-0.379,0) 2(0.379,0)
  silkscreen extent -0.64,-0.67 0.64,0.67, body extent -0.74,-0.38 0.74,0.38, height 0.25
FP-B2B-ZR-3_4_LF_SN-MFG [mm]
  rect 1.2x1.2 hole 0.7 paste-2539.97 mask+0: 1(0.75,-0.45)
  round 1.2 hole 0.7 paste-2539.97 mask+0: 2(-0.75,-0.45)
  silkscreen extent -2.25,-1.75 2.85,1.75, body extent -2.25,-1.75 2.25,1.75, height 4.5
FP-B3B-ZR-3_4_LF_SN_P-MFG [mm]
  rect 1.2x1.2 hole 0.7 paste-2539.97 mask+0: 1(1.5,-0.45)
  round 1.2 hole 0.7 paste-2539.97 mask+0: 2(0,-0.45) 3(-1.5,-0.45)
  silkscreen extent -3,-1.75 3.77,1.75, body extent -3,-1.75 3,1.75, height 4.5
FP-BLM21-0_2-t0_85-e0_5-MFG [mm]
  rect 0.6x1.25 smd paste+0 mask+0: 1(-0.9,0) 2(0.9,0)
  silkscreen extent -0.23,-0.72 0.23,0.72, body extent -1.3,-0.82 1.3,0.82, height 0.25
FP-CC0402-MFG [mm]
  rect 0.5x0.5 smd paste+0 mask+0: 1(-0.5,0) 2(0.5,0)
  silkscreen extent -0.53,-0.68 0.52,-0.68, body extent -0.87,-0.48 0.87,0.48, height 0.25
FP-CL21-IPC_B [mm]
  rect 1.255x1.456 smd paste+0 mask+0: 1(-0.826,0) 2(0.826,0)
  silkscreen extent -1.45,-1.13 1.45,1.13, body extent -1.7,-0.98 1.7,0.98, height 0.25
FP-CL21-IPC_C [mm]
  rect 1.055x1.356 smd paste+0 mask+0: 1(-0.726,0) 2(0.726,0)
  silkscreen extent -1.25,-1.12 1.25,1.12, body extent -1.35,-0.82 1.35,0.82, height 0.25
FP-ERA3A-IPC_B [mm]
  rect 1.055x1.006 smd paste+0 mask+0: 1(-0.726,0) 2(0.726,0)
  silkscreen extent -1.25,-0.9 1.25,0.9, body extent -1.5,-0.75 1.5,0.75, height 0.25
FP-GRM033-0_03-IPC_A [mm]
  rect 0.554x0.463 smd paste+0 mask+0: 1(-0.354,0) 2(0.354,0)
  silkscreen extent -0.18,0.63 0.63,0.63, body extent -0.83,-0.43 0.83,0.43, height 0.25
FP-GRM033-0_03-IPC_B [mm]
  rect 0.454x0.363 smd paste+0 mask+0: 1(-0.304,0) 2(0.304,0)
  silkscreen extent -0.53,-0.58 0.53,-0.58, body extent -0.68,-0.33 0.68,0.33, height 0.25
FP-GRM188-0_2-IPC_C [mm]
  rect 0.905x0.906 smd paste+0 mask+0: 1(-0.601,0) 2(0.601,0)
  silkscreen extent -0.98,0.9 1.05,0.9, body extent -1.15,-0.6 1.15,0.6, height 0.25
FP-RC0201-0_26-IPC_C [mm]
  rect 0.354x0.263 smd paste+0 mask+0: 1(-0.254,0) 2(0.254,0)
  silkscreen extent -0.43,-0.57 0.43,0.57
FP-RPA0010A-MFG [mm]
  rrect40% 0.6x0.25 smd paste+0 mask+0: 1(-1.4,0.75) 2(-1.4,0.25) 3(-1.4,-0.25) 4(-1.4,-0.75)
  rrect40% 0.25x0.6 smd paste+0 mask+0: 5(-0.93,-1.4) 7(0.87,-1.4) 10(-0.93,1.4)
  rrect40% 0.25x1.7 smd paste-1000 mask+0: 6(0.37,-0.85)
  round 0.35 smd paste+0 mask+0: 8(0.99,0.8)
  rrect25% 0.4x2.1 smd paste-1000 mask+0: 9(-0.21,0.65)
  Top Layer region: 0.8,1.7 0.781,1.696 0.765,1.685 0.754,1.669 0.75,1.65 0.75,1.65 0.75,-0.35 0.754,-0.369 0.765,-0.385 0.781,-0.396 0.8,-0.4 0.8,-0.4 1.15,-0.4 1.15,-0.375 1.66,-0.375 1.685,-0.368 1.703,-0.35 1.71,-0.325 1.71,-0.325 1.71,-0.175 1.706,-0.156 1.695,-0.14 1.679,-0.129 1.66,-0.125 1.66,-0.125 1.15,-0.125 1.15,0.125 1.66,0.125 1.679,0.129 1.695,0.14 1.706,0.156 1.71,0.175 1.71,0.175 1.71,0.325 1.703,0.35 1.685,0.368 1.66,0.375 1.66,0.375 1.15,0.375 1.15,0.625 1.66,0.625 1.679,0.629 1.695,0.64 1.706,0.656 1.71,0.675 1.71,0.675 1.71,0.825 1.703,0.85 1.685,0.868 1.66,0.875 1.66,0.875 1.2,0.875 1.181,0.879 1.165,0.89 1.154,0.906 1.15,0.925 1.15,0.925 1.15,1.65 1.143,1.675 1.125,1.693 1.1,1.7 1.1,1.7 1.1,1.7
  silkscreen extent -2.22,-1.55 1.55,1.55, body extent -1.8,-1.8 1.81,1.8, height 0.25
FP-RQM0029A-MFG [mm]
  round 0.192 smd paste+0 mask+0: 1(-1.369,1.631)
  rrect50% 0.6x0.2 smd paste+0 mask+0: 2(-1.9,1.2) 3(-1.9,0.8) 4(-1.9,0.4) 5(-1.9,0) 6(-1.9,-0.4) 7(-1.9,-0.8) 8(-1.9,-1.2) 20(1.9,0) 21(1.9,0.4) 22(1.9,0.8) 23(1.9,1.2)
  round 0.158 smd paste+0 mask+0: 9(-1.412,-1.763)
  rrect50% 0.2x0.6 smd paste+0 mask+0: 10(-1,-1.9) 11(-0.6,-1.9) 12(-0.2,-1.9) 13(0.2,-1.9) 14(0.6,-1.9) 15(1,-1.9)
  round 0.175 smd paste+0 mask+0: 16(1.431,-1.631) 24(1.381,1.631)
  rrect50% 0.7x0.2 smd paste+0 mask+0: 17(1.85,-1.2)
  rrect50% 0.65x0.2 smd paste+0 mask+0: 18(1.875,-0.8)
  rrect50% 0.68x0.2 smd paste+0 mask+0: 19(1.86,-0.4)
  rrect50% 0.2x1 smd paste+0 mask+0: 25(0.9,1.7) 26(0.45,1.7) 27(0,1.7) 28(-0.45,1.7)
  rrect50% 0.2x0.95 smd paste+0 mask+0: 29(-0.9,1.725)
  Top Layer region: -2.2,1.65 -2.193,1.675 -2.175,1.693 -2.15,1.7 -2.15,1.7 -1.45,1.7 -1.45,2.15 -1.443,2.175 -1.425,2.193 -1.4,2.2 -1.4,2.2 -1.3,2.2 -1.275,2.193 -1.257,2.175 -1.25,2.15 -1.25,2.15 -1.25,1.55 -1.254,1.531 -1.265,1.515 -1.281,1.504 -1.3,1.5 -1.3,1.5 -2.15,1.5 -2.169,1.504 -2.185,1.515 -2.196,1.531 -2.2,1.55 -2.2,1.55
  Top Layer region: -2.2,-1.65 -2.193,-1.675 -2.175,-1.693 -2.15,-1.7 -2.15,-1.7 -1.5,-1.7 -1.5,-2.15 -1.496,-2.169 -1.485,-2.185 -1.469,-2.196 -1.45,-2.2 -1.45,-2.2 -1.35,-2.2 -1.331,-2.196 -1.315,-2.185 -1.304,-2.169 -1.3,-2.15 -1.3,-2.15 -1.3,-1.55 -1.304,-1.531 -1.315,-1.515 -1.331,-1.504 -1.35,-1.5 -1.35,-1.5 -2.15,-1.5 -2.169,-1.504 -2.185,-1.515 -2.196,-1.531 -2.2,-1.55 -2.2,-1.55
  Top Layer region: 2.2,-1.65 2.193,-1.675 2.175,-1.693 2.15,-1.7 2.15,-1.7 1.5,-1.7 1.5,-2.15 1.496,-2.169 1.485,-2.185 1.469,-2.196 1.45,-2.2 1.45,-2.2 1.35,-2.2 1.325,-2.193 1.307,-2.175 1.3,-2.15 1.3,-2.15 1.3,-1.55 1.304,-1.531 1.315,-1.515 1.331,-1.504 1.35,-1.5 1.35,-1.5 2.15,-1.5 2.169,-1.504 2.185,-1.515 2.196,-1.531 2.2,-1.55 2.2,-1.55
  Top Layer region: 2.2,1.65 2.196,1.669 2.185,1.685 2.169,1.696 2.15,1.7 2.15,1.7 1.45,1.7 1.45,2.15 1.446,2.169 1.435,2.185 1.419,2.196 1.4,2.2 1.4,2.2 1.3,2.2 1.275,2.193 1.257,2.175 1.25,2.15 1.25,2.15 1.25,1.55 1.254,1.531 1.265,1.515 1.281,1.504 1.3,1.5 1.3,1.5 2.15,1.5 2.169,1.504 2.185,1.515 2.196,1.531 2.2,1.55 2.2,1.55
  silkscreen extent -2.88,-2.3 2.3,2.3, body extent -2.3,-2.3 2.3,2.3, height 0.25
FP-RT0402-MFG [mm]
  rect 0.5x0.6 smd paste+0 mask+0: 1(-0.5,0) 2(0.5,0)
  silkscreen extent -0.5,-0.71 0.5,0.7, body extent -0.85,-0.4 0.85,0.4, height 0.25
FP-T1433-2C-MFG [mm]
  rect 0.7x0.2 smd paste+0 mask+0: 1(-1.475,1.2) 2(-1.475,0.8) 3(-1.475,0.4) 4(-1.475,0) 5(-1.475,-0.4) 6(-1.475,-0.8) 7(-1.475,-1.2) 8(1.475,-1.2) 9(1.475,-0.8) 10(1.475,-0.4) 11(1.475,0) 12(1.475,0.4) 13(1.475,0.8) 14(1.475,1.2)
  rect 1.78x2.35 smd paste+0 mask+0: 15(0,0)
  silkscreen extent -2.63,-1.8 1,1.8, body extent -1.92,-1.65 1.92,1.65, height 0.25
HC-PM254-8.5H-2x10PS [mm]
  rect 1.02x2.5 smd: 1(-11.43,-2.921) 2(-8.89,-2.921) 3(-6.35,-2.921) 4(-3.81,-2.921) 5(-1.27,-2.921) 6(1.27,-2.921) 7(3.81,-2.921) 8(6.35,-2.921) 9(8.89,-2.921) 10(11.43,-2.921) 11(11.43,2.579) 12(8.89,2.579) 13(6.35,2.579) 14(3.81,2.579) 15(1.27,2.579) 16(-1.27,2.579) 17(-3.81,2.579) 18(-6.35,2.579) 19(-8.89,2.579) 20(-11.43,2.579)
  silkscreen extent -12.7,-3.72 12.7,3.38
HoYLR2512-3W-10mR-1% [mil]
  rect 50.49x136.06 smd paste-3937.01 mask+2: 1(-120,5) 2(121.44,5)
  silkscreen extent -154,-72 156,82
IHLP3232DZER5R6M11 [mm]
  rect 2.6x5.4 smd: 1(-3.684,0) 2(3.556,0)
  silkscreen extent -4.41,-4.1 4.29,4.1
LQFP48_STM [mil]
  rect 58x11 smd paste-29 mask+5: 1(-166,108.27) 2(-166,88.58) 3(-166,68.9) 4(-166,49.21) 5(-166,29.53) 6(-166,9.84) 7(-166,-9.84) 8(-166,-29.53) 9(-166,-49.21) 10(-166,-68.9) 11(-166,-88.58) 12(-166,-108.27) 25(166,-108.27) 26(166,-88.58) 27(166,-68.9) 28(166,-49.21) 29(166,-29.53) 30(166,-9.84) 31(166,9.84) 32(166,29.53) 33(166,49.21) 34(166,68.9) 35(166,88.58) 36(166,108.27)
  rect 11x58 smd paste-29 mask+5: 13(-108.27,-166) 14(-88.58,-166) 15(-68.9,-166) 16(-49.21,-166) 17(-29.53,-166) 18(-9.84,-166) 19(9.84,-166) 20(29.53,-166) 21(49.21,-166) 22(68.9,-166) 23(88.58,-166) 24(108.27,-166) 37(108.27,166) 38(88.58,166) 39(68.9,166) 40(49.21,166) 41(29.53,166) 42(9.84,166) 43(-9.84,166) 44(-29.53,166) 45(-49.21,166) 46(-68.9,166) 47(-88.58,166) 48(-108.27,166)
  silkscreen extent -142,-215 215,212, body extent -181,-181 181,181, height 63
RESC0201(0603)_L [mm] "Chip Resistor, Body 0.6x0.3mm, IPC High Density"
  rect 0.35x0.35 smd: 1(-0.3,0) 2(0.3,0)
  body extent -0.31,-0.16 0.31,0.16, height 0.3
RESC0201(0603)_N [mm] "Chip Resistor, Body 0.6x0.3mm, IPC Medium Density"
  rect 0.45x0.45 smd: 1(-0.35,0) 2(0.35,0)
  body extent -0.31,-0.16 0.31,0.16, height 0.3
RESC1005X40X25NL05T10 [mm] "Chip Resistor, 2-Leads, Body 1.00x0.50mm, IPC Medium Density"
  rect 0.6x0.55 smd: 1(-0.425,0) 2(0.425,0)
  body extent -0.53,-0.27 0.53,0.28, height 0.4
SOP65P640X120-25N [mm]
  rect 1.475x0.45 smd: 1(-2.938,3.575) 2(-2.938,2.925) 3(-2.938,2.275) 4(-2.938,1.625) 5(-2.938,0.975) 6(-2.938,0.325) 7(-2.938,-0.325) 8(-2.938,-0.975) 9(-2.938,-1.625) 10(-2.938,-2.275) 11(-2.938,-2.925) 12(-2.938,-3.575) 13(2.938,-3.575) 14(2.938,-2.925) 15(2.938,-2.275) 16(2.938,-1.625) 17(2.938,-0.975) 18(2.938,-0.325) 19(2.938,0.325) 20(2.938,0.975) 21(2.938,1.625) 22(2.938,2.275) 23(2.938,2.925) 24(2.938,3.575)
  rect 2.96x4.02 smd: 25(0,0)
  silkscreen extent -3.67,4.15 -2.2,4.15, body extent -3.2,-3.9 3.2,3.9, height 1.13
SOT95P280X110-6N [mm]
  rect 1.25x0.6 smd: 1(-1.25,0.95) 2(-1.25,0) 3(-1.25,-0.95) 4(1.25,-0.95) 5(1.25,0) 6(1.25,0.95)
  silkscreen extent -1.88,-1.45 0.28,1.6, body extent -1.4,-1.45 1.4,1.45, height 0.97
SPM6530T-1R0M120 [mm]
  rect 2x3.4 smd: 1(-2.794,0) 2(2.806,0)
  silkscreen extent -3.69,-3.4 3.71,3.4
WJ500V-5.08-2P [mm]
  round 2 hole 1.3: 1(-2.54,-0.381) 2(2.54,-0.381)
  silkscreen extent -5.68,-4.9 5.08,5.26
X1321WVS-2x07J-C40D53 [mm]
  rect 0.74x2.2 smd: 1(-3.81,-1.822) 2(-3.81,1.778) 3(-2.54,-1.822) 4(-2.54,1.778) 5(-1.27,-1.822) 6(-1.27,1.778) 7(0,-1.822) 8(0,1.778) 9(1.27,-1.822) 10(1.27,1.778) 11(2.54,-1.822) 12(2.54,1.778) 13(3.81,-1.822) 14(3.81,1.778)
  silkscreen extent -4.44,-1.55 4.44,1.5
XL-1608SURC-06 [mm]
  rect 0.8x0.8 smd paste+0 mask+0.051: 1(-0.707,-0.02) 2(0.892,-0.013)
  silkscreen extent -1.4,-0.76 1.48,0.74

## Part data
BALLAST_POT BATCHG_TS CAM_Y CAM_Z RPI_UART RPI_USB: library part CMP-17439-000712-1, "CONN HEADER VERT 3POS 1.5MM", Flammability Rating="UL94 V-0", Insulation Color=Natural, Max Operating Temperature=85°C, Min Operating Temperature=-25°C, Voltage Rating (AC)=50V, Connector Type=Header, Contact Finish - Mating=TIN, Contact Material=Brass, Contact Shape=Circular, Contact Type="Male Pin", Fastening Type=Detent, Insulation Material=Nylon, Mated Stacking Heights=5.6mm, Mount="Through Hole", Number of Positions=3, Number of Rows=1, Packaging=Bulk, Series=ZH, Termination=Press-Fit
BATMON_TH BUTTON_PWR DRV_AUX1 LAMP1 LAMP2: library part CMP-17439-000601-1, "CONN HEADER VERT 2POS 1.5MM", Flammability Rating="UL94 V-0", Insulation Color=Natural, Voltage Rating=50V, Connector Type=Header, Contact Finish - Mating=TIN, Contact Material=Brass, Contact Shape=Circular, Contact Type="Male Pin", Fastening Type=Detent, Insulation Material=Nylon, Lead Free="Lead Free", Mated Stacking Heights=5.6mm, Mount="Through Hole", Number of Positions=2, Number of Rows=1, Packaging=Bulk, Pitch=1.5mm, Series=ZH, Termination=Press-Fit
C1 C2 C3 C4 C7 C13 C15 C20 C23 C24 C25 C26 C27 C28 C29 C30 C31 C32 C42 C45 C48 C51 C52: library part CMP-06035-036234-1, "Chip Multilayer Ceramic Capacitors for General Purpose, 0201, 0.10uF, X5R, 15%, 10%, 25V", Capacitance=100nF, Case Code (Imperial)=0201, Case Code (Metric)=0603, Dielectric=X5R, Max Operating Temperature=85°C, Min Operating Temperature=-55°C, Package Quantity=15000, Resistor Type=Ceramic, Tolerance=10%, Voltage Rating=25V, Case/Package=0201, Height=0.3mm, Lead Free="Lead Free", Length=0.024inch, Mount="Surface Mount", Packaging="Tape and Reel", Termination=SMD/SMT, Thickness=0.013inch, Voltage Rating (DC)=25V, Weight=1.2E-05oz, Width=0.012inch
C5 C6 C8 C10 C12 C16 C17 C18 C33 C34 C46 C54: library part CMP-06035-045466-1, "Chip Multilayer Ceramic Capacitors for General Purpose, 0603, 10uF, X5R, 15%, 20%, 35V", Capacitance=10uF, Case Code (Imperial)=0603, Case Code (Metric)=1608, Dielectric=X5R, Max Operating Temperature=85°C, Min Operating Temperature=-55°C, Tolerance=20%, Voltage Rating=35V, Case/Package=0603, Length=0.063inch, Mount="Surface Mount", Packaging="Tape and Reel", Thickness=0.039inch, Voltage Rating (DC)=35V, Width=0.031inch
C9 C11: library part CMP-03422-000113-1, "CAP CER 0.047UF 50V X7R 0402", Capacitance="47 nF", Manufacturer=YAGEO, Package=CC0402, Temperature="-55°C to +125°C", Temperature Characteristic=X7R, Temperature Coefficient=30ppm/°C, Temperature Range High=+125°C, Temperature Range Low=-55°C, Tolerance=0.1, Voltage Rating="50 V", Automotive=No, Automotive Grade=NA, Category=Cap, ComponentLink2Description=Datasheet, ComponentLink2URL=http://www.yageo.com/documents/recent/UPY-GP_NP0_16V-to-50V_16.pdf, Device Class L1="Passive Components", Device Class L2=Capacitors, Device Class L3="Ceramic Capacitors", Digikey Description="CAP CER 0.047UF 50V X7R 0402", Footprint Url=http://www.yageo.com/exep/pages/download/literatures/UPY-C_GEN_24.pdf, Height=0.55mm, Ipc Land Pattern Name=CAPC10050X50, Lead Free=Yes, Manufacturer Part Number=CC0402KRX7R9BB473, Material=Ceramic, Mouser Description="CC Series 0402 0.047 uF 50 V ±10% Tolerance X7R Multilayer Ceramic Capacitor", Octopart=https://octopart.com/cc0402krx7r9bb473-yageo-68083038, RoHS=TRUE
C14: library part CMP-13271-004306-1, "CL21 Series 0805 4.7uF 50V ±10% Tolerance X5R Multilayer Ceramic Chip Capacitor", Capacitance=4.7uF, Case Code (Imperial)=0805, Case Code (Metric)=2012, Dielectric=X5R, Max Operating Temperature=85°C, Min Operating Temperature=-55°C, Package Quantity=1, Tolerance=10%, Voltage Rating=50V, Case/Package=0805, Depth=1.25mm, Length=2mm, Mount="Surface Mount", Packaging="Tape and Reel", Radiation Hardening=No, RoHS Compliant=Yes, Series=CL, Thickness=0.055inch, Width=0.049inch
C19: library part CMP-06035-000519-1, "Chip Multilayer Ceramic Capacitors for General Purpose, 0201, 1000pF, X7R, 15%, 10%, 50V", Capacitance=1nF, Case Code (Imperial)=0201, Case Code (Metric)=0603, Dielectric=X7R, Max Operating Temperature=125°C, Min Operating Temperature=-55°C, Package Quantity=15000, Resistor Type=Ceramic, Tolerance=10%, Voltage Rating=50V, Case/Package=0201, Height=0.3mm, Lead Free="Lead Free", Length=0.024inch, Mount="Surface Mount", Packaging="Tape and Reel", Termination=SMD/SMT, Thickness=0.013inch, Voltage Rating (DC)=50V, Weight=1.2E-05oz, Width=0.012inch
C21 C22: "Capacitor", Manufacturer_Name=SAMSUNG, Arrow Part Number=CL21A106KBYQNNE, Arrow Price/Stock=https://www.arrow.com/en/products/cl21a106kbyqnne/samsung-electro-mechanics?region=nac, Height=1.45mm, Manufacturer_Part_Number=CL21A106KBYQNNE
C43 C44 C49 C50 C53 C55 C56 C59: library part CMP-2000-06104-1, "Multi-layer Ceramic Capacitor, 22 uF, -55 to 85 degC, 2-Pin SMD (0805), RoHS, Tape and Reel", Capacitance=22µF, Manufacturer="Samsung Electro-Mechanics", Operating Temperature=-55°C~85°C, Package / Case=0805(2012Metric), Package Description="2-Pin Surface Mount Device, Body 2.0 x 1.25 mm", Package Reference=0805, Ratings=-, Standard Package=2,000, Temperature Coefficient=X5R, Tolerance=±20%, Voltage - Rated=25V, Applications=GeneralPurpose, Category=Capacitors, Datasheet URL=http://datasheet.octopart.com/CL21A226MAQNNNE-Samsung-datasheet-48647558.pdf, Datasheet Version=07/2015, Family=CeramicCapacitors, Featured Product=Multi-LayerCeramicCapacitors, Features=-, Height - Seated (Max)=-, Lead Spacing=-, Lead Style=-, Manufacturer URL=http://www.samsungsem.com/global/index.jsp, Mounting Technology=SurfaceMount, Mounting Type=SurfaceMount,MLCC, Online Catalog=CLSeries,HighCapacitance, Other Names=1276-2908-2, Packaging=Tape&Reel(TR), Product Training Modules=HighCapMLCCFamily, RoHS Information=MLCCRoHS2Compliance, Series=CL, Size / Dimension="0.079\"Lx0.049\"W(2.00mmx1.25mm)", Thickness (Max)="0.055\"(1.40mm)"
C47: library part CMP-13271-004243-1, "CL21 Series 0805 2.2uF 50V ±10% Tolerance X5R Multilayer Ceramic Chip Capacitor"
DRV1 DRV2: "Integrated Circuit", Manufacturer_Name="Texas Instruments", Mouser Part Number=595-DRV8908QPWPRQ1, Arrow Part Number=DRV8908QPWPRQ1, Arrow Price/Stock=https://www.arrow.com/en/products/drv8908qpwprq1/texas-instruments, Datasheet Link=https://www.ti.com/lit/gpn/DRV8908-Q1, Height=1.2mm, Manufacturer_Part_Number=DRV8908QPWPRQ1, Mouser Price/Stock=https://www.mouser.co.uk/ProductDetail/Texas-Instruments/DRV8908QPWPRQ1?qs=GBLSl2Akirv2iYVv21RwNA%3D%3D
FB1: library part CMP-0686-00665-3, "Chip Ferrite Bead, 0805, 1000Ω @ 100MHz, 0.27Ω, 25%, 600mA", Case Code (Imperial)=0805, Case Code (Metric)=2012, Current Rating=500mA, DC Current=200mA, DC Resistance (DCR)=280mR, Frequency=100MHz, Max Current Rating=600mA, Max Operating Temperature=125°C, Min Operating Temperature=-55°C, Package Quantity=1, Tolerance=25%, Case/Package=0805, Core Material=Ferrite, Depth=1.25mm, Height=0.85mm, Impedance=1kR, Lead Free="Lead Free", Length=2mm, Material=Steel, Max DC Current=200mA, Military Standard=Not, Number of Circuits=1, Number of Lines=1, Number of Pins=2, Packaging="Tape and Reel", Radiation Hardening=No, REACH SVHC="No SVHC", Shielding=Unshielded, Termination=SMD/SMT, Test Frequency=100MHz, Weight=0.000194oz, Width=1.25mm
POSITION: library part B6B-ZR(LF)(SN)-LSM303AGRTR
PS1: "Power Supply", Manufacturer_Name="Texas Instruments", Mouser Part Number=595-LMR51430XDDCR, Arrow Part Number=LMR51430XDDCR, Arrow Price/Stock=null?utm_currency=USD&region=nac, Datasheet Link=https://www.ti.com/lit/ds/symlink/lmr51430.pdf?HQS=dis-mous-null-mousermode-dsf-pf-null-wwe&ts=1665567212982&ref_url=https%253A%252F%252Fwww.mouser.co.uk%252F, Height=1.1mm, Manufacturer_Part_Number=LMR51430XDDCR, Mouser Price/Stock=https://www.mouser.co.uk/ProductDetail/Texas-Instruments/LMR51430XDDCR?qs=vvQtp7zwQdP8miJIr5Aupg%3D%3D
R1 R3 R14 R15 R16 R17 R18 R19 R20 R21 R22: library part CMP-03412-037826-1, "RES SMD 10K OHM 5% 1/20W 0201", Case Code (Imperial)=0201, Case Code (Metric)=0603, Max Operating Temperature=125°C, Max Power Dissipation=50mW, Min Operating Temperature=-55°C, Resistance=10kR, Resistance Tolerance=5%, Resistor Type="Thick Film", Temperature Coefficient=200ppm/°C, Voltage Rating=25V, Case/Package=0201, Construction=Rectangular, Contact Plating=Tin, Depth=0.3mm, Features="Moisture Resistant", Lead Free="Lead Free", Length=0.6mm, Military Standard=Not, Number of Terminations=2, Packaging="Tape and Reel", Power Rating=50mW, Radiation Hardening=No, RoHS Compliant=Yes, Series=RC, Size Code=0201, Termination=SMD/SMT, Tolerance=5%, Voltage Rating (DC)=25V
R2: library part CMP-03412-007418-1, "RES SMD 17.4K OHM 0.1% 1/16W", Manufacturer=Yageo, Package=RT0402, Power Rating=0.063W, Resistance=17.4KΩ, Temperature="-55°C to +155°C", Temperature Coefficient="25 ppm/°C", Temperature Range High=+155°C, Temperature Range Low=-55°C, Tolerance=0.001, Voltage Rating=50V, Automotive=No, Category=Res, ComponentLink2Description=Datasheet, ComponentLink2URL=http://www.yageo.com/documents/recent/PYu-RT_1-to-0.01_RoHS_L_9.pdf, Composition="Thin Film", Device Class L1="Passive Components", Device Class L2=Resistors, Device Class L3="Chip SMD Resistors", Digikey Description="RES SMD 17.4K OHM 0.1% 1/16W", Footprint Url=http://www.yageo.com/exep/pages/download/literatures/PYu-R_Mount_10.pdf, Height=0.35mm, Ipc Land Pattern Name=RESC10050X30, Lead Free=Yes, Manufacturer Part Number=RT0402BRD0717K4L, Mouser Description="Res Thin Film 0402 17.4K Ohm 0.1% 1/16W ±25ppm/°C Molded SMD Paper T/R", Octopart=https://octopart.com/rt0402brd0717k4l-yageo-1251600, RoHS=TRUE, Series=RT
R4: library part CMP-2000-00870-2, "RES SMD 100 OHM 0.1% 1/10W 0603", Case Code (Imperial)=0603, Case Code (Metric)=1608, Max Operating Temperature=155°C, Max Power Dissipation=100mW, Min Operating Temperature=-55°C, Package Quantity=5000, Resistance=100R, Resistance Tolerance=0.1%, Resistor Type="Thin Film", Temperature Coefficient=25ppm/°C, Voltage Rating=75V, Case/Package=0603, Construction=Rectangular, Contact Plating=Tin, Depth=0.8mm, Height=0.45mm, Length=1.6mm, Military Standard=Not, Mount="Surface Mount", Number of Pins=2, Number of Terminations=2, Packaging="Tape and Reel", Power Rating=100mW, Radiation Hardening=No, REACH SVHC="No SVHC", RoHS Compliant=Yes, Series=ERA-3A, Size Code=0603, Technology="METAL FILM", Termination=SMD/SMT, Tolerance=0.1%, Width=0.8mm
R5: library part CMP-1010-00543-1, "13K7 0.05W 1% 0201 (0603 Metric)  SMD", Case-EIA=0201, Case-Metric=0603, Power="0.05 W", Tolerance="1 %", Technology=SMT
R6: library part CMP-2002-07106-1, Manufacturer="Yageo / Phycomp", Part Number=RC0402FR-071M5L
R7: library part CMP-1010-00694-1, "300K 0.05W 1% 0201 (0603 Metric)  SMD", Case-EIA=0201, Case-Metric=0603, Power="0.05 W", Tolerance="1 %", Technology=SMT
R8 R10 R11 R12 R13: library part CMP-1010-00674-1, "200K 0.05W 1% 0201 (0603 Metric)  SMD", Case-EIA=0201, Case-Metric=0603, Power="0.05 W", Tolerance="1 %", Technology=SMT
R9: Resistance=10mOhm
R24: library part CMP-03412-020976-2, "RES 191kΩ ±1% 0.063W 0402", Case Code (Imperial)=0402, Case Code (Metric)=1005, Max Operating Temperature=155°C, Max Power Dissipation=63mW, Min Operating Temperature=-55°C, Power Rating=62.5mW, Resistance=191kR, Resistor Type="Thick Film", Temperature Coefficient=100ppm/°C, Tolerance=1%, Voltage Rating=50V, Case/Package=0402, Features="Moisture Resistant", Height=0.015inch, Length=0.039inch, Number of Terminations=2, Packaging="Tape and Reel", RoHS Compliant=Yes, Series=AC, Termination=SMD/SMT, Width=0.5mm
R27: library part CMP-2002-07343-1, Manufacturer="Yageo / Phycomp", Part Number=RC0402FR-07100KL
U1: "No Description Available", Mfr_Name=STMicroelectronics, RefDes=RefDes, Type=Type
U2 U6: library part CMP-0394-00651-2, "Single Output LDO, 150 mA, Fixed 3.3 V Output, 2.5 to 24 V Input, with Ultra-Low IQ, 5-pin SOT-23 (DBV), -40 to 125 degC, Green (RoHS & no Sb/Br)", Manufacturer="Texas Instruments", Accuracy(%)=2, Code_JEDEC=MO-178, ComponentLink1Description="Manufacturer URL", ComponentLink1URL=http://www.ti.com/, ComponentLink2Description=Datasheet, ComponentLink2URL=http://www.ti.com/general/docs/lit/getliterature.tsp?genericPartNumber=TLV70433&fileType=pdf, ComponentLink3Description="Package Specification", ComponentLink3URL=http://www.ti.com/litv/pdf/mpds018i, DatasheetVersion=SBVS148C, Eco-Plan="Green (RoHS & no Sb/Br)", Fixed Output Options(V)=3.3, Iout(Max)(A)=0.15, Iq(Typ)(mA)=0.003, Mounting Technology="Surface Mount", PackageDescription="5-Pin Plastic Small Outline, Body 1.60 Ãƒâ€” 2.90 mm, Pitch 0.95 mm", PackageReference=DBV0005A, PackageVersion=4073253-4/K, PartNumber=TLV70433DBVR, SubFamily="Single Channel LDO", Vdo(Typ)(mV)=400, Vin(Max)(V)=24, Vin(Min)(V)=2.5, Vout Adj(Max)(V)=3.3, Vout Adj(Min)(V)=3.3
U3: library part CMP-04918-000008-1, "IC POWER MANAGEMENT", Manufacturer="Texas Instruments", Max Junction Temp=+150°C, Max Supply Voltage=28V, Min Supply Voltage=4.5V, Nominal Supply Current=140uA, Output Current=6A, Output Voltage=0.6-13V, Package=RPA0010A, Switching Frequency=500kHz, Temperature="-40°C to +150°C", Temperature Range Low=-40°C, Automotive=No, Category=IC, ComponentLink2Description=Datasheet, ComponentLink2URL=http://www.ti.com/lit/ds/symlink/tps56637.pdf, Device Class L1="Integrated Circuits (ICs)", Device Class L2="Power Management ICs", Device Class L3="Voltage Regulators - Switching", Digikey Description="IC POWER MANAGEMENT", Height=1mm, Lead Free=Yes, Manufacturer Part Number=TPS56637RPAR, Max Duty Cycle=91%, Number Of Outputs=1, Octopart=https://octopart.com/tps56637rpar-texas+instruments-97650653, Output Type=AdjustableProgrammable, RoHS=TRUE, Standoff Height=0mm, Switching Topology=Buck, Temperature Range High=+150°C
U4: library part CMP-04911-000031-1, "I2C CONTROLLED, 5-A, 1-4 CELL BU", RoHS Compliant=Yes
U5: library part CMP-05715-000069-1, "IC FUEL GAUGE LI+ M5 EZ 14TDFN", Manufacturer=Maxim, Max Junction Temp=+150°C, Max Supply Voltage=4.9V, Min Supply Voltage=2.3V, Nominal Supply Current=15uA, Package=T1433-2C, Temperature="-40°C to +85°C", Temperature Range High=+85°C, Temperature Range Low=-40°C, Automotive=No, Category=IC, ComponentLink2Description=Datasheet, ComponentLink2URL=https://datasheets.maximintegrated.com/en/ds/MAX17261.pdf, Device Class L1="Integrated Circuits (ICs)", Device Class L2="Power Management ICs", Device Class L3="Battery Management", Digikey Description="IC FUEL GAUGE LI+ M5 EZ 14TDFN", Footprint Url=https://pdfserv.maximintegrated.com/land_patterns/90-0063.PDF, Height=0.8mm, Lead Free=Yes, Manufacturer Part Number=MAX17261METD+, Mouser Description="5.1µA Multi-Cell Fuel Gauge with ModelGauge m5 EZ", Octopart=https://octopart.com/max17261metd%2B-maxim+integrated-91765041, RoHS=TRUE, Standoff Height=0mm

## Via types
v1: diameter 0.45, hole 0.3, Top Layer to Bottom Layer, tented both sides, 3113 vias
v2: diameter 0.45, hole 0.3, Top Layer to Bottom Layer, 4 vias

## Nets (pads, with @x,y where several pads share a name; then routed paths per layer and width w, separated by ;. In a path a pad name is that pad's centre, name@x,y a point inside that pad or via, vN(x,y) a via of type N, cw(c..) or ccw(c..) an arc to the next point about the centre after c; other vN are vias at no path point)
3.3V: BALLAST_POT.1 C29.2 C48.2 C50.2 C56.2 CON_RPI.1 CON_RPI.17 DRV1.6 DRV2.6 POSITION.1 PRESSURE.1 R3.2 R12.2 R14.2 R16.1 R17.1 RANGE.1 | length 113
  Top Layer w0.102: PRESSURE.1@45.092,66.04 RANGE.1@45.092,61.976 45.116,61.952 POSITION.1@45.116,57.912 ; v1(72.136,28.956) 72.203,28.889 72.203,28.706 72.52,28.388 72.52,28.135 R12.2@72.644,28.011
  Top Layer w0.127: DRV2.6@39.912,45.533 39.972,45.593 C48.2@41.098,45.593 41.143,45.593 41.261,45.711 41.261,45.79 41.411,45.939 42.223,45.939 C56.2@42.684,45.478 ; v1(41.05,48.787) 41.103,48.841 41.602,48.841 R17.1@41.656,48.895 ; v1(41.198,35.764) 41.26,35.826 41.46,35.826 41.656,36.022 R16.1@41.656,36.068 ; v1(41.91,46.382) 41.918,46.382 42.684,45.616 C56.2@42.684,45.478 ; v1(42.248,32.858) 42.248,32.913 42.34,33.006 42.684,32.662 42.684,32.524 C50.2@42.684,32.512 ; C56.2@42.684,45.466 C56.2@42.684,45.478 ; POSITION.1@45.116,57.912 46.437,59.233 CON_RPI.1@50.013,59.233 ; R14.2@48.006,55.626 50.84,55.626 51.328,56.114 51.328,58.558 50.653,59.233 CON_RPI.1@50.013,59.233 ; R3.2@48.006,58.166 48.006,58.212 48.074,58.28 48.12,58.28 48.626,58.786 49.566,58.786 CON_RPI.1@50.013,59.233
  Top Layer w0.254: DRV1.6@39.912,32.564 39.938,32.538 41.021,32.538 C29.2@41.047,32.512 41.093,32.512 41.147,32.566 41.147,32.735 41.334,32.922 42.169,32.922 42.286,32.922 42.615,32.593 C50.2@42.684,32.524 ; v1(42.248,32.858) C50.2@42.248,32.922 ; v1(49.53,38.223) 49.53,38.53 49.913,38.913 CON_RPI.17@50.013,38.913
  Bottom Layer w0.127: v1(41.198,35.764) 40.276,34.843 37.048,34.843 36.744,34.538 36.744,33.382 36.966,33.16 41.592,33.16 41.754,32.998 41.769,32.998 41.848,32.919 42.186,32.919 v1(42.248,32.858) ; v1(41.91,46.382) 41.91,47.927 v1(41.05,48.787) 41.05,53.846 43.382,56.179 43.626,56.179 43.897,56.45 43.897,56.694 POSITION.1@45.116,57.912
  Bottom Layer w0.254: v1(41.198,35.764) 41.235,35.802 41.235,36.16 42.399,37.323 42.399,37.556 42.708,37.865 47.208,37.865 47.5,37.573 49.003,37.573 v1@49.53,38.1 ; v1(41.91,46.382) 41.91,46.329 42.181,46.059 42.181,46.055 43.377,44.859 45.004,44.859 45.752,44.111 45.752,43.64 46.18,43.212 46.434,43.212 46.446,43.199 47.225,43.199 48.736,41.688 ; v1@49.53,38.132 49.53,40.332 48.736,41.126 48.736,41.688 ; v1(72.136,28.956) 69.107,31.985 69.107,32.222 68.398,32.931 68.038,32.931 67.548,33.421 67.548,33.781 60.157,41.172 BALLAST_POT.1@58.87,41.172 53.711,41.172 53.586,41.296 53.15,41.296 53.025,41.172 50.409,41.172 49.893,41.688 48.736,41.688
3V3_LDO: C1.1 C2.1 C3.1 C4.1 C31.2 CHIPSET_DBG.3 CON_IBOARD_F.16 FB1.2 U1.1 U1.24 U1.36 U1.48 U2.3 | length 125.7
  Top Layer w0.102: C2.1@61.214,21.794 61.214,19.489 60.946,19.22 60.946,16.361 61.468,15.838 CHIPSET_DBG.3@61.468,14.656 ; U1.24@63.798,28.854 63.798,29.451 64.001,29.655 64.001,29.739 63.992,29.749 63.992,30.122 64.305,30.435 64.324,30.435
  Top Layer w0.127: v1(61.468,11.684) 61.468,12.446 ; 64.324,30.435 64.935,30.435 64.991,30.492 66.581,30.492 66.586,30.498 67.111,30.498 67.176,30.433 67.607,30.433 68.246,31.072 68.956,31.072 69.16,31.275 69.492,31.275 69.708,31.491 71.887,31.491 74.422,28.956 74.422,26.857 73.798,26.233 FB1.2@73.798,25.908
  Top Layer w0.254: C31.2@29.718,12.75 30.221,12.75 30.419,12.552 U2.3@30.419,12.397 30.419,12.122 32.265,10.276 32.939,10.276 33.055,10.16 v1(33.782,10.16) ; v1(41.148,1.213) 42.71,2.775 51.716,2.775 58.828,9.887 59.146,9.887 59.455,10.196 59.455,10.433 61.468,12.446 CHIPSET_DBG.3@61.468,13.926 61.468,14.656 62.358,15.546 67.616,15.546 68.267,16.197 68.283,16.197 68.417,16.331 68.417,16.347 69.392,17.322 C4.1@69.392,19.304 69.365,19.304 69.311,19.358 69.311,20.409 U1.48@69.298,20.422 69.298,21.018 70.168,21.888 U1.1@70.764,21.888 70.777,21.875 C1.1@71.851,21.875 ; C2.1@61.214,21.794 61.214,21.821 61.268,21.875 62.319,21.875 U1.36@62.332,21.888 ; C3.1@63.246,28.754 63.785,28.754 63.798,28.767 U1.24@63.798,28.854 ; C1.1@71.936,21.944 72.105,21.944 73.798,23.637 FB1.2@73.798,25.908
  Bottom Layer w0.127: CON_IBOARD_F.16@43.659,33.96 44.399,33.96 45.689,32.67 46.386,32.67 46.611,32.896 46.999,32.896 49,30.895 52.819,30.895 57.143,26.57 57.143,22.728 61.468,18.404 v1(61.468,11.684)
  Bottom Layer w0.254: v1(33.782,10.16) 33.782,8.128 40.66,1.25 41.11,1.25 v1(41.148,1.213)
+5: C46.2 C54.2 CAM_Y.1 CAM_Z.1 CON_IBOARD_F.5 CON_RPI.2 CON_RPI.4 L3.2 R10.2 R27.2 | length 187.7
  Top Layer w0.127: R10.2@73.66,28.011 v1(73.66,28.702)
  Top Layer w0.305: v1(34.798,10.922) 34.745,10.922 34.454,11.213 34.418,11.213 34.269,11.362 34.269,12.172 34.418,12.321 34.527,12.321 34.798,12.592 R27.2@34.798,12.617
  Top Layer w0.508: C46.2@33.748,20.32 C54.2@33.748,21.336 L3.2@36.954,21.336 ; CON_RPI.4@55.512,56.693 55.563,56.642 v1(57.15,56.642) ; CON_RPI.2@55.512,59.233 55.563,59.182 v1(57.15,59.182)
  Top Layer w1.27: v1(36.322,19.558) v1(37.084,19.558) v1(37.846,19.558) ; 37.559,20.033 L3.2@37.559,21.941 ; L3.2@37.846,21.941 v1(37.846,19.558) ; L3.2@38.608,21.941 v1(38.608,19.558) ; L3.2@39.37,22.352 v1(39.37,19.558) v1(38.608,19.558) ; L3.2@41.024,22.606 43.18,20.45 ; 41.689,20.333 L3.2@41.689,21.941 ; v1(48.006,33.02) 48.487,32.539 51.468,32.539 51.899,32.108 51.899,20.318 51.421,19.839 48.557,19.839 48.276,19.558 v1(43.18,19.558) v1(42.418,19.558) v1(41.656,19.558) v1(40.894,19.558) ; v1(61.722,33.02) 63.754,33.02 64.151,33.417 64.151,33.671 65.287,34.807 65.541,34.807 65.786,35.052 68.126,35.052 70.044,33.135 71.334,33.135 72.45,34.251 72.45,35.108 71.628,35.93 71.628,41.726 69.596,43.758 69.596,50.38 63.038,56.939 62.647,56.939 CAM_Y.1@62.484,57.102 ; v1(37.846,19.558) v1(38.608,19.558) ; v1(40.894,19.558) 40.894,21.941 40.229,22.606 L3.2@39.624,22.606 39.624,20.066 v1(40.132,19.558) v1(40.894,19.558)
  Bottom Layer w0.127: v1(48.006,33.02) 52.471,33.02 59.539,25.953 61.406,25.953 62.587,27.133 64.568,27.133 65.831,25.871 65.831,23.43 66.57,22.691 66.994,22.691 68.411,24.107 68.411,26.14 68.115,26.436 67.142,26.436 66.847,26.732 66.847,27.116 67.287,27.557 72.517,27.557 73.66,28.7 v1(73.66,28.702)
  Bottom Layer w0.305: v1(34.798,10.922) 34.798,18.034 v1(36.322,19.558)
  Bottom Layer w1.27: CON_IBOARD_F.5@38.159,33.96 40.929,33.96 41.673,34.704 41.673,34.775 42.104,35.207 46.228,35.207 46.327,35.306 48.006,35.306 ; v1(48.006,33.02) v1(48.006,34.036) 48.006,35.306 ; v1(57.15,56.642) 57.61,57.102 59.23,57.102 ; v1(57.15,59.182) 59.23,57.102 ; v1@60.452,33.011 59.086,33.011 58.595,33.503 52.349,33.503 50.546,35.306 48.006,35.306 ; v1(60.452,33.02) v1(61.722,33.02) ; CAM_Y.1@62.484,57.102 59.23,57.102
  other v1: 61.065,33.011
+12: C28.1 C42.2 C43.2 C44.2 C45.1 C47.1 C49.2 C51.2 C53.2 C55.2 C59.2 CON_IBOARD_F.3 CON_IBOARD_F.18 DRV1.16 DRV1.21 DRV2.16 DRV2.21 L2.2 PS1.3 R24.2 | length 199.7
  Top Layer w0.102: R24.2@30.732,3.175 30.917,2.99 31.3,2.99 v1(31.525,2.765)
  Top Layer w0.254: v1(30.734,43.688) 32.123,43.688 32.668,44.233 DRV2.21@34.036,44.233 ; v2(32.624,31.798) 32.624,31.745 32.767,31.603 32.767,31.296 32.821,31.242 C28.1@32.867,31.242 32.878,31.253 34.025,31.253 DRV1.21@34.036,31.264 ; C47.1@35.116,13.843 35.116,13.742 35.67,13.188 PS1.3@36.769,13.188
  Top Layer w0.635: v1(12.446,41.148) 14.227,39.367 16.59,39.367 21.368,34.589 29.06,34.589 29.638,35.167 C53.2@31.115,35.167 ; 14.265,43.569 14.583,43.887 14.583,48.924 16.967,51.308 v1(18.623,51.308) ; v1(30.226,44.196) 29.868,44.196 27.297,46.767 27.297,49.026 v1(27.743,49.473) 29.915,49.473 29.972,49.53 31.177,49.53 32.879,47.827 32.879,47.734 33.125,47.489 34.03,47.489 DRV2.16@34.036,47.483 ; v1(32.512,33.782) 32.512,33.847 32.879,34.215 32.879,34.263 33.125,34.508 34.03,34.508 DRV1.16@34.036,34.514 ; PS1.3@36.769,13.188 36.786,13.17 36.786,12.644 36.83,12.6 v2(36.83,12.192)
  Top Layer w1.27: v1(11.684,39.37) v1(11.684,40.132) ; 11.684,40.386 v1(12.056,40.758) ; v1(12.446,41.148) 14.265,42.967 14.265,43.569 ; v1(33.778,2.093) 33.839,2.032 v1(34.544,2.032) v1(35.325,2.032) v1(36.068,2.032) 38.862,2.032 40.861,4.031 ; v1@41.148,4.031 42.261,4.031 42.926,4.696 42.926,5.83 C43.2@45.466,5.83 46.482,5.83 ; v1(41.148,4.064) v1(41.148,4.826) v1(41.148,5.588) v1(41.148,6.35) v1(41.148,7.112) v1(41.148,7.874)